# Altium PCB XC7AXXXT.PcbDoc (part 1 of 2)
Units mil, origin at the board's own origin, x right, y up, seen from the top; angles counter-clockwise.
Board outline 2381.89 x 2066.93 mil, 4 copper layers (Top Layer, SIG1, SIG2, Bottom Layer); 188 components, 308 nets, 1233 pads, 145 vias.
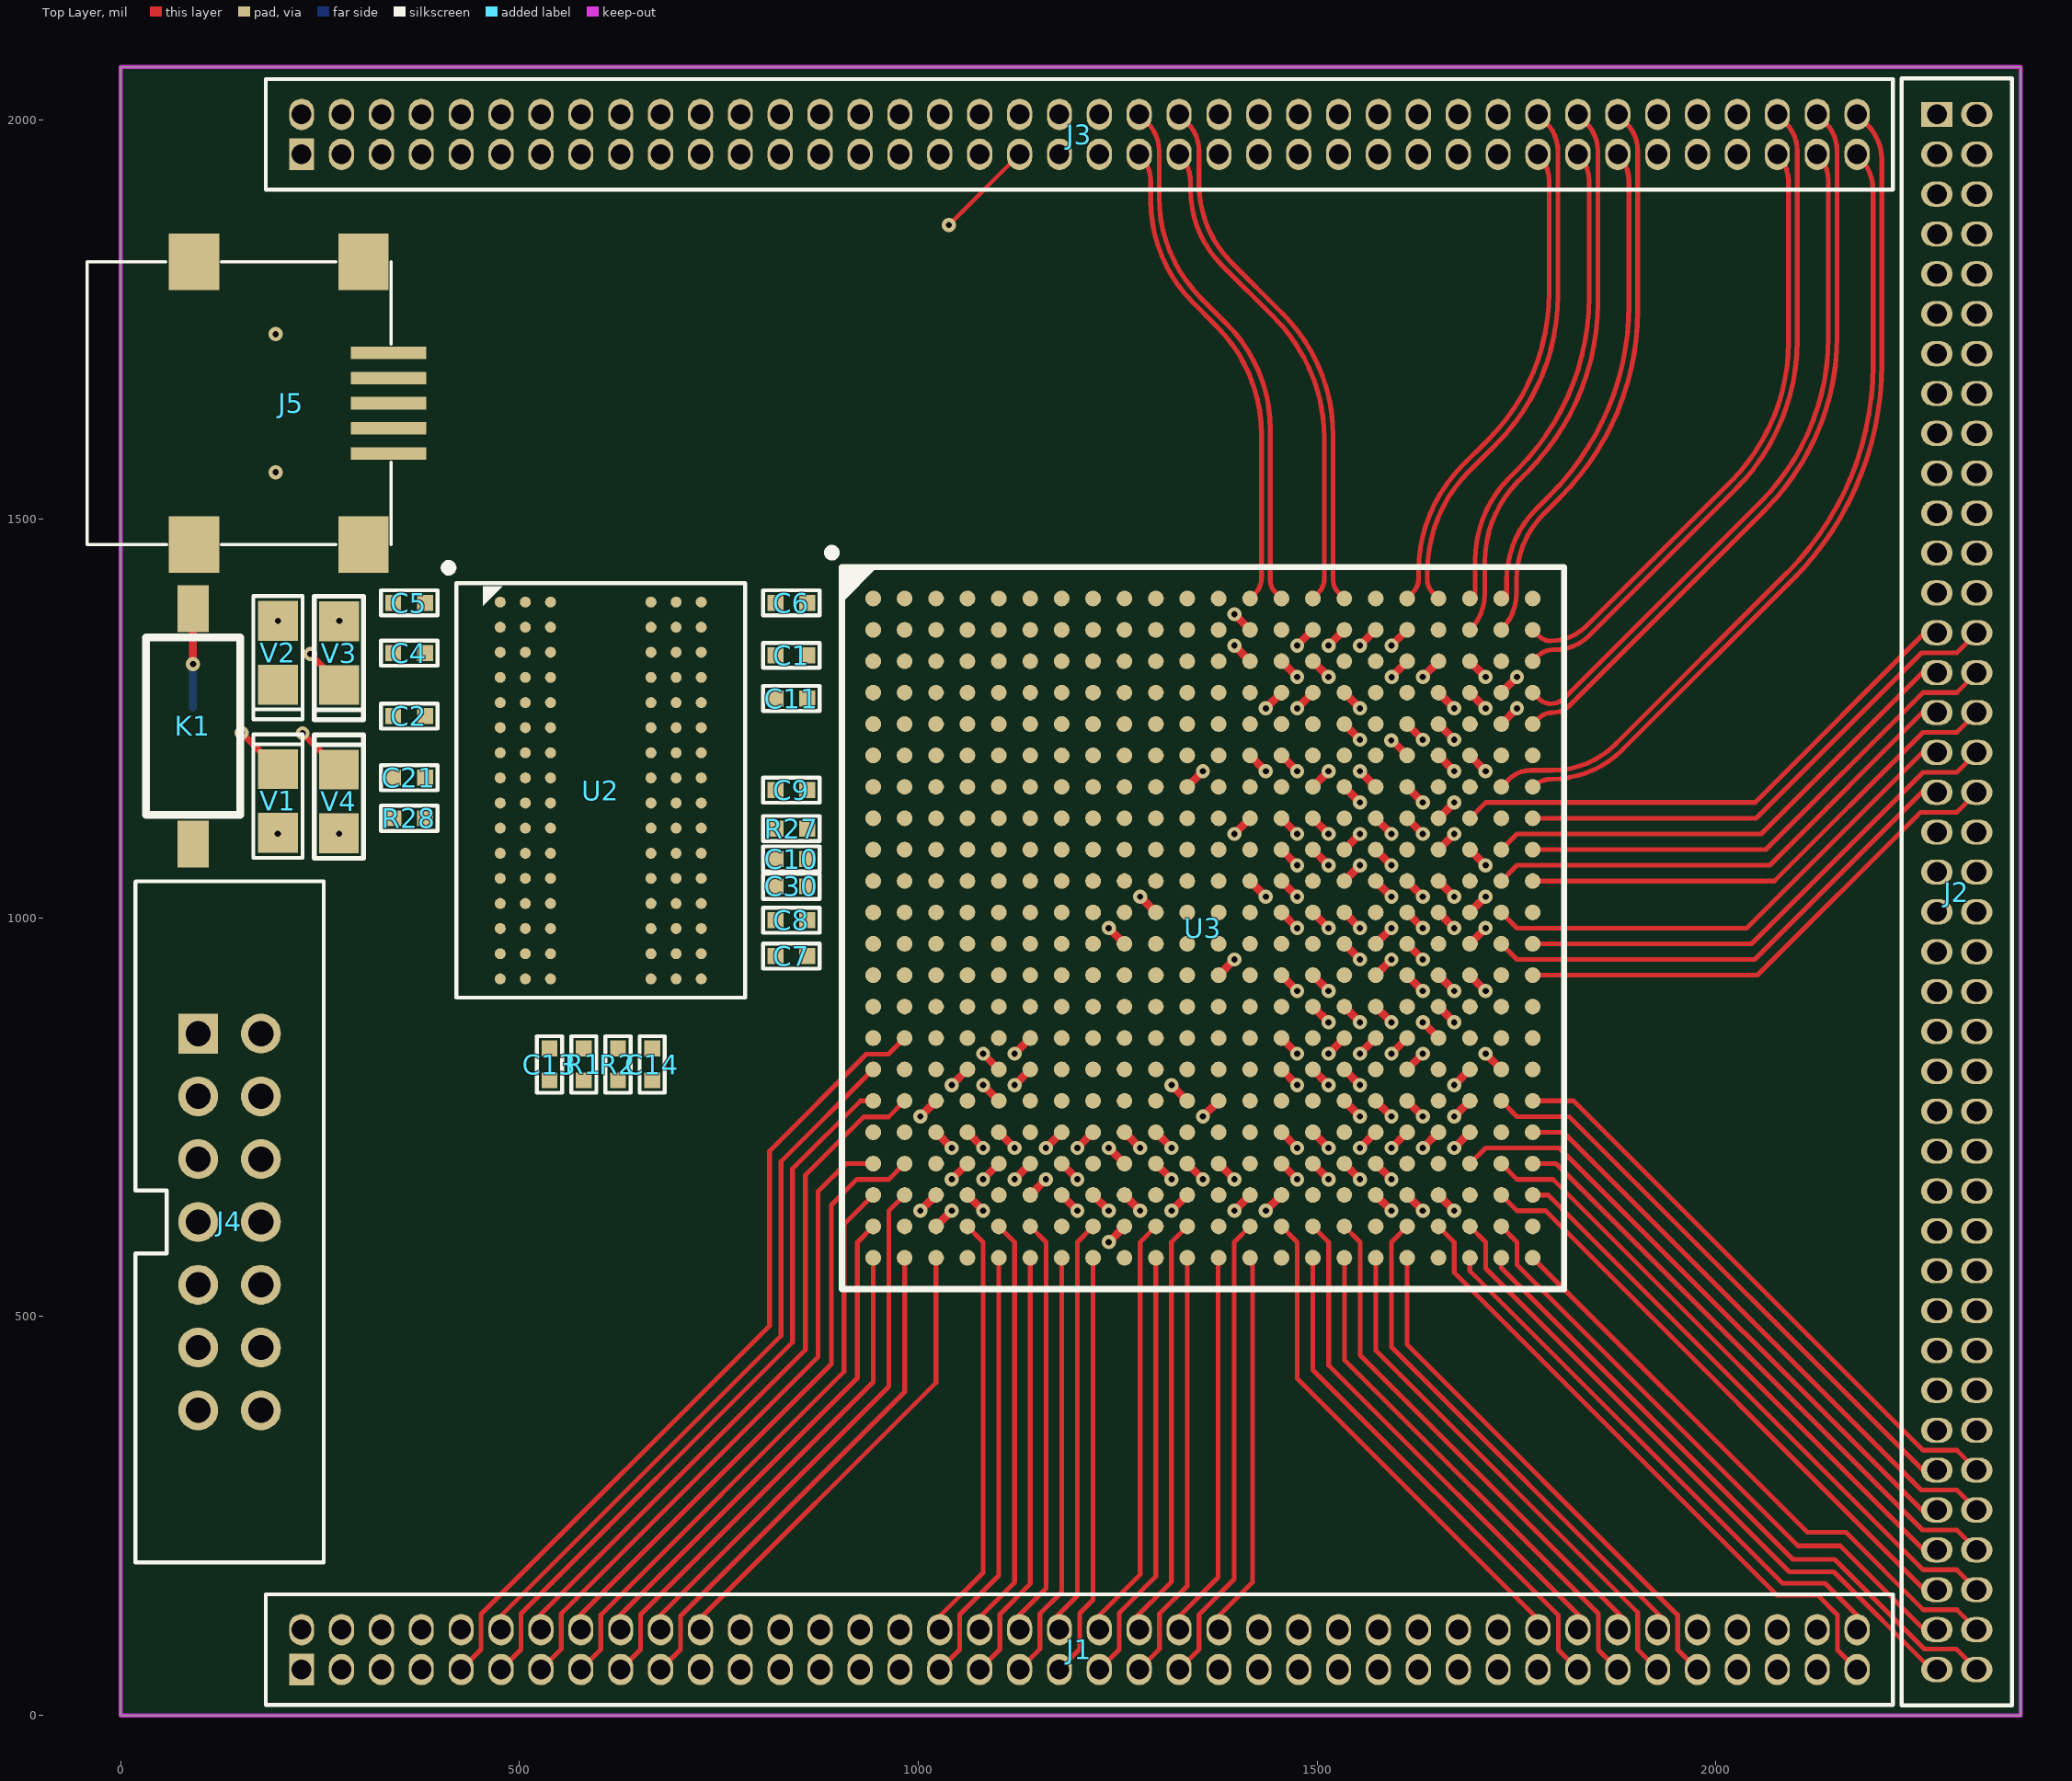
[diagram p0: Top Layer view]
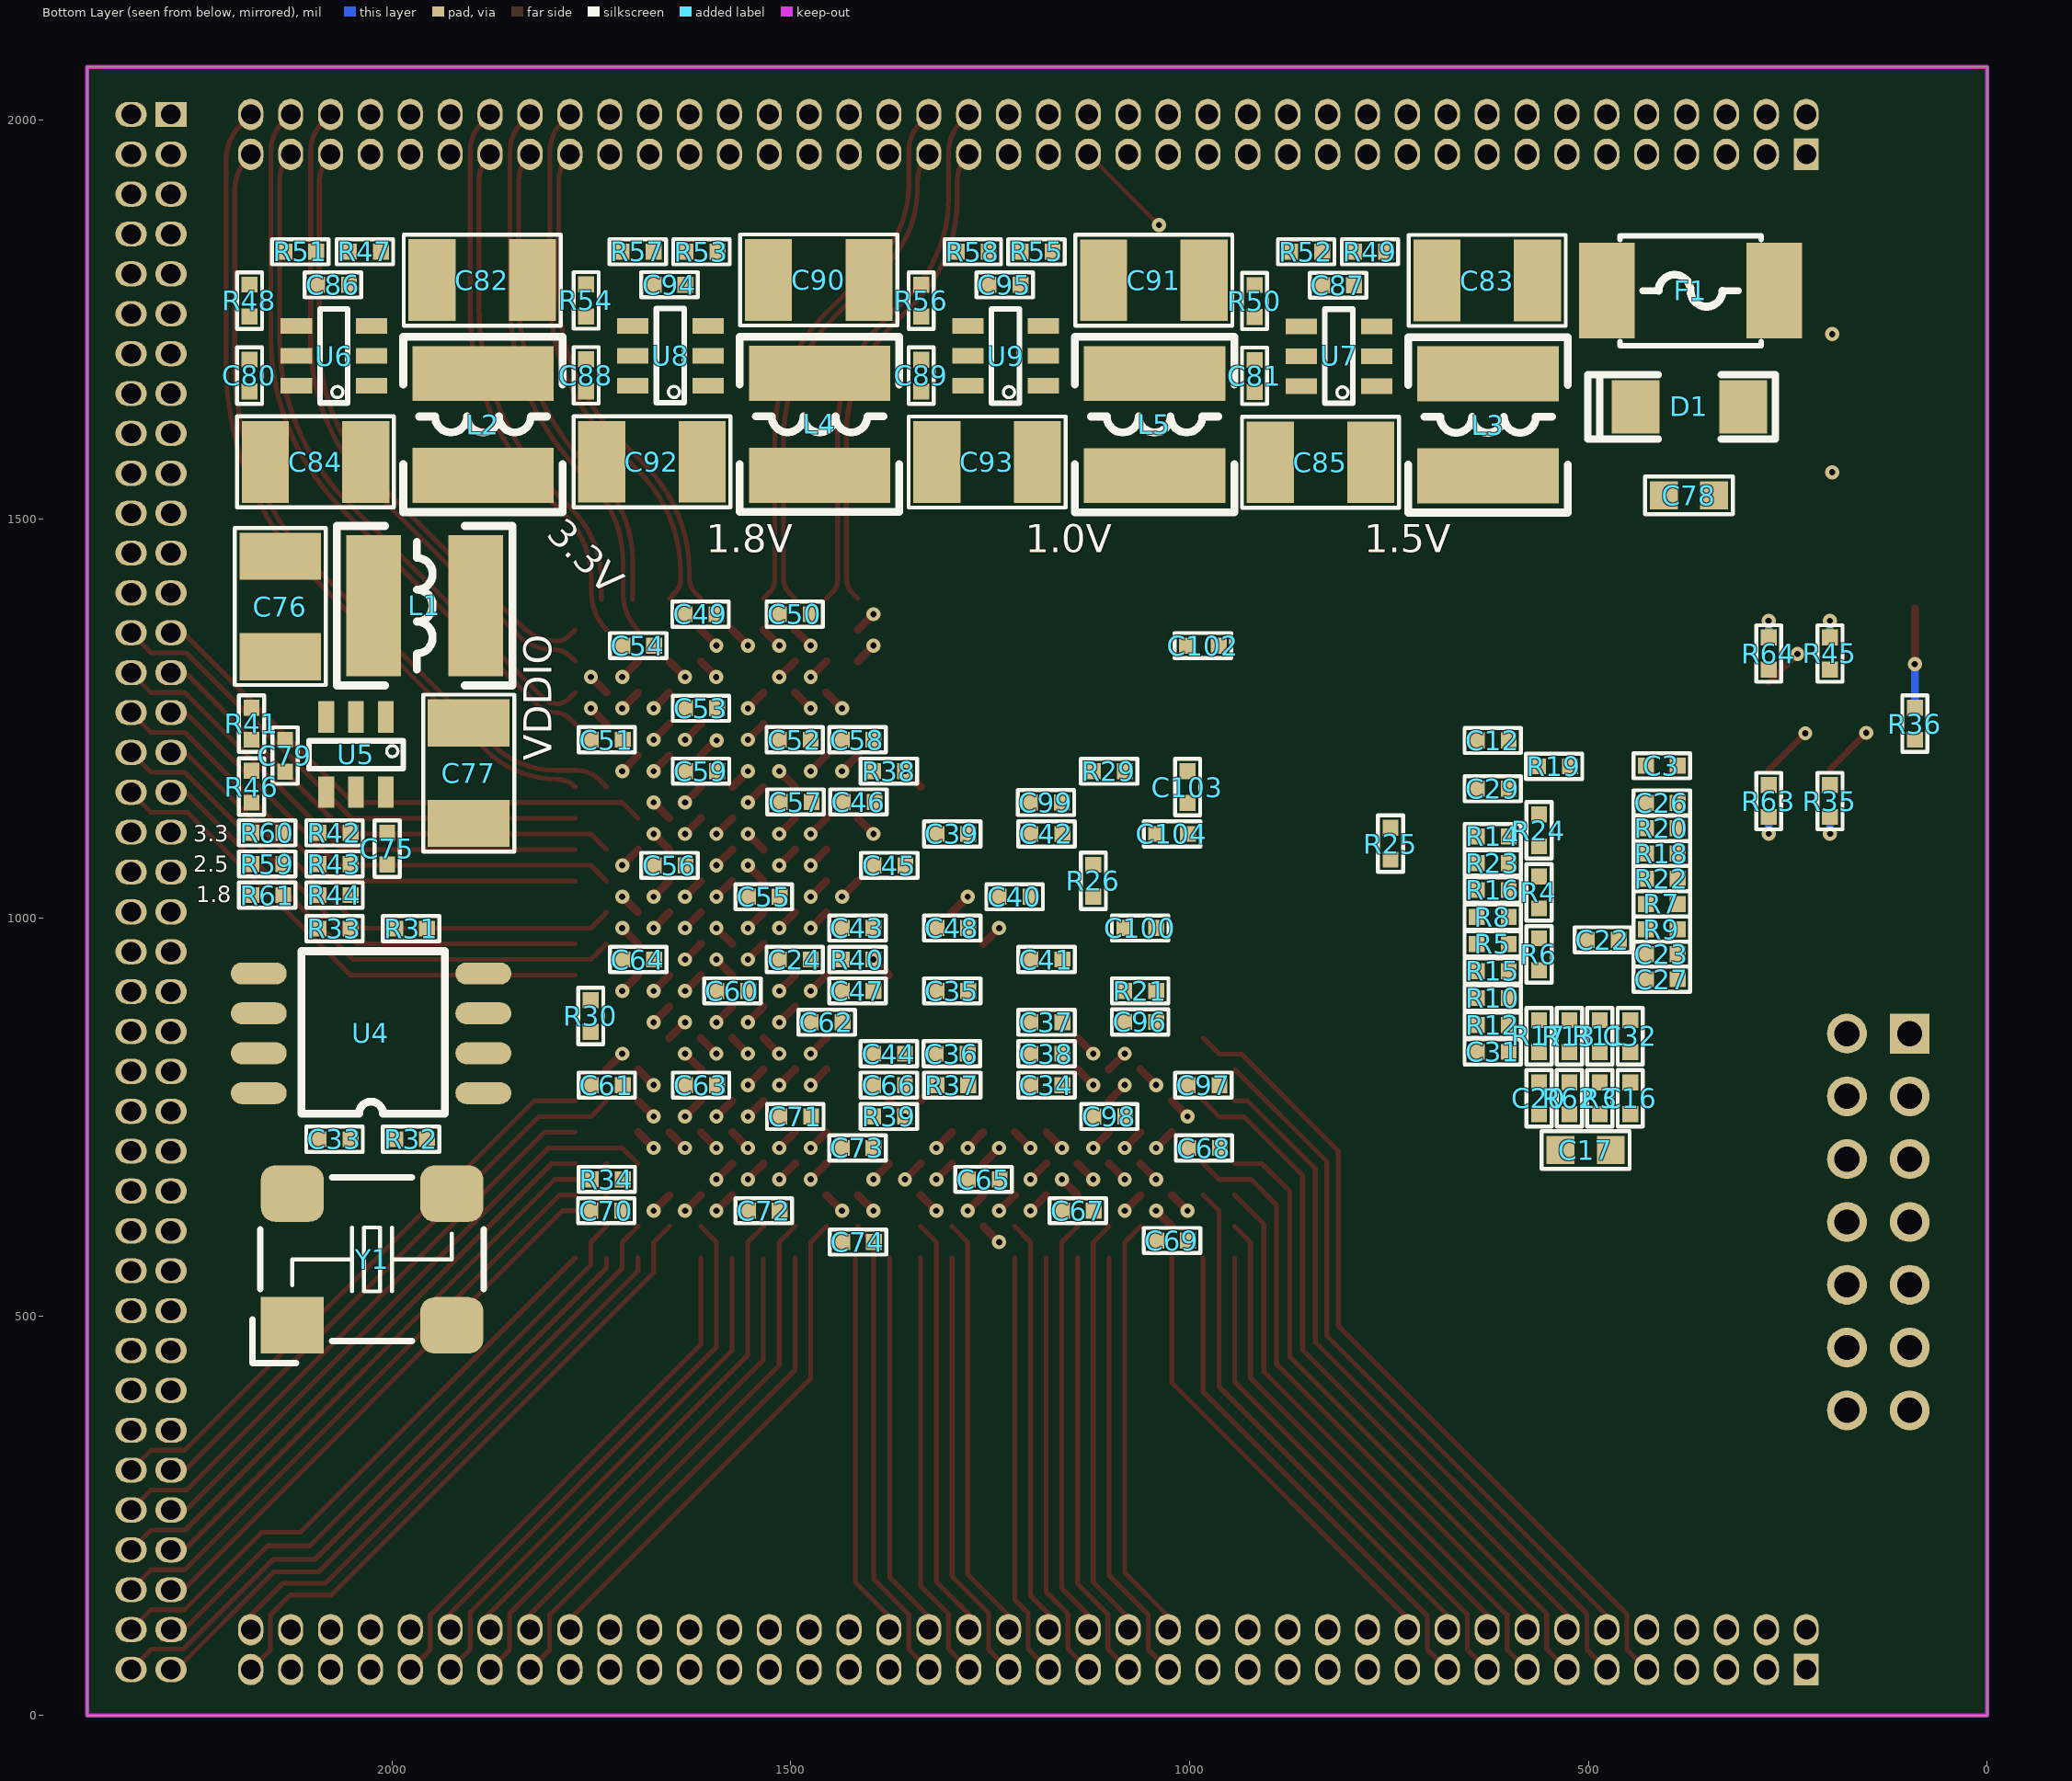
[diagram p1: Bottom Layer view, seen from below]
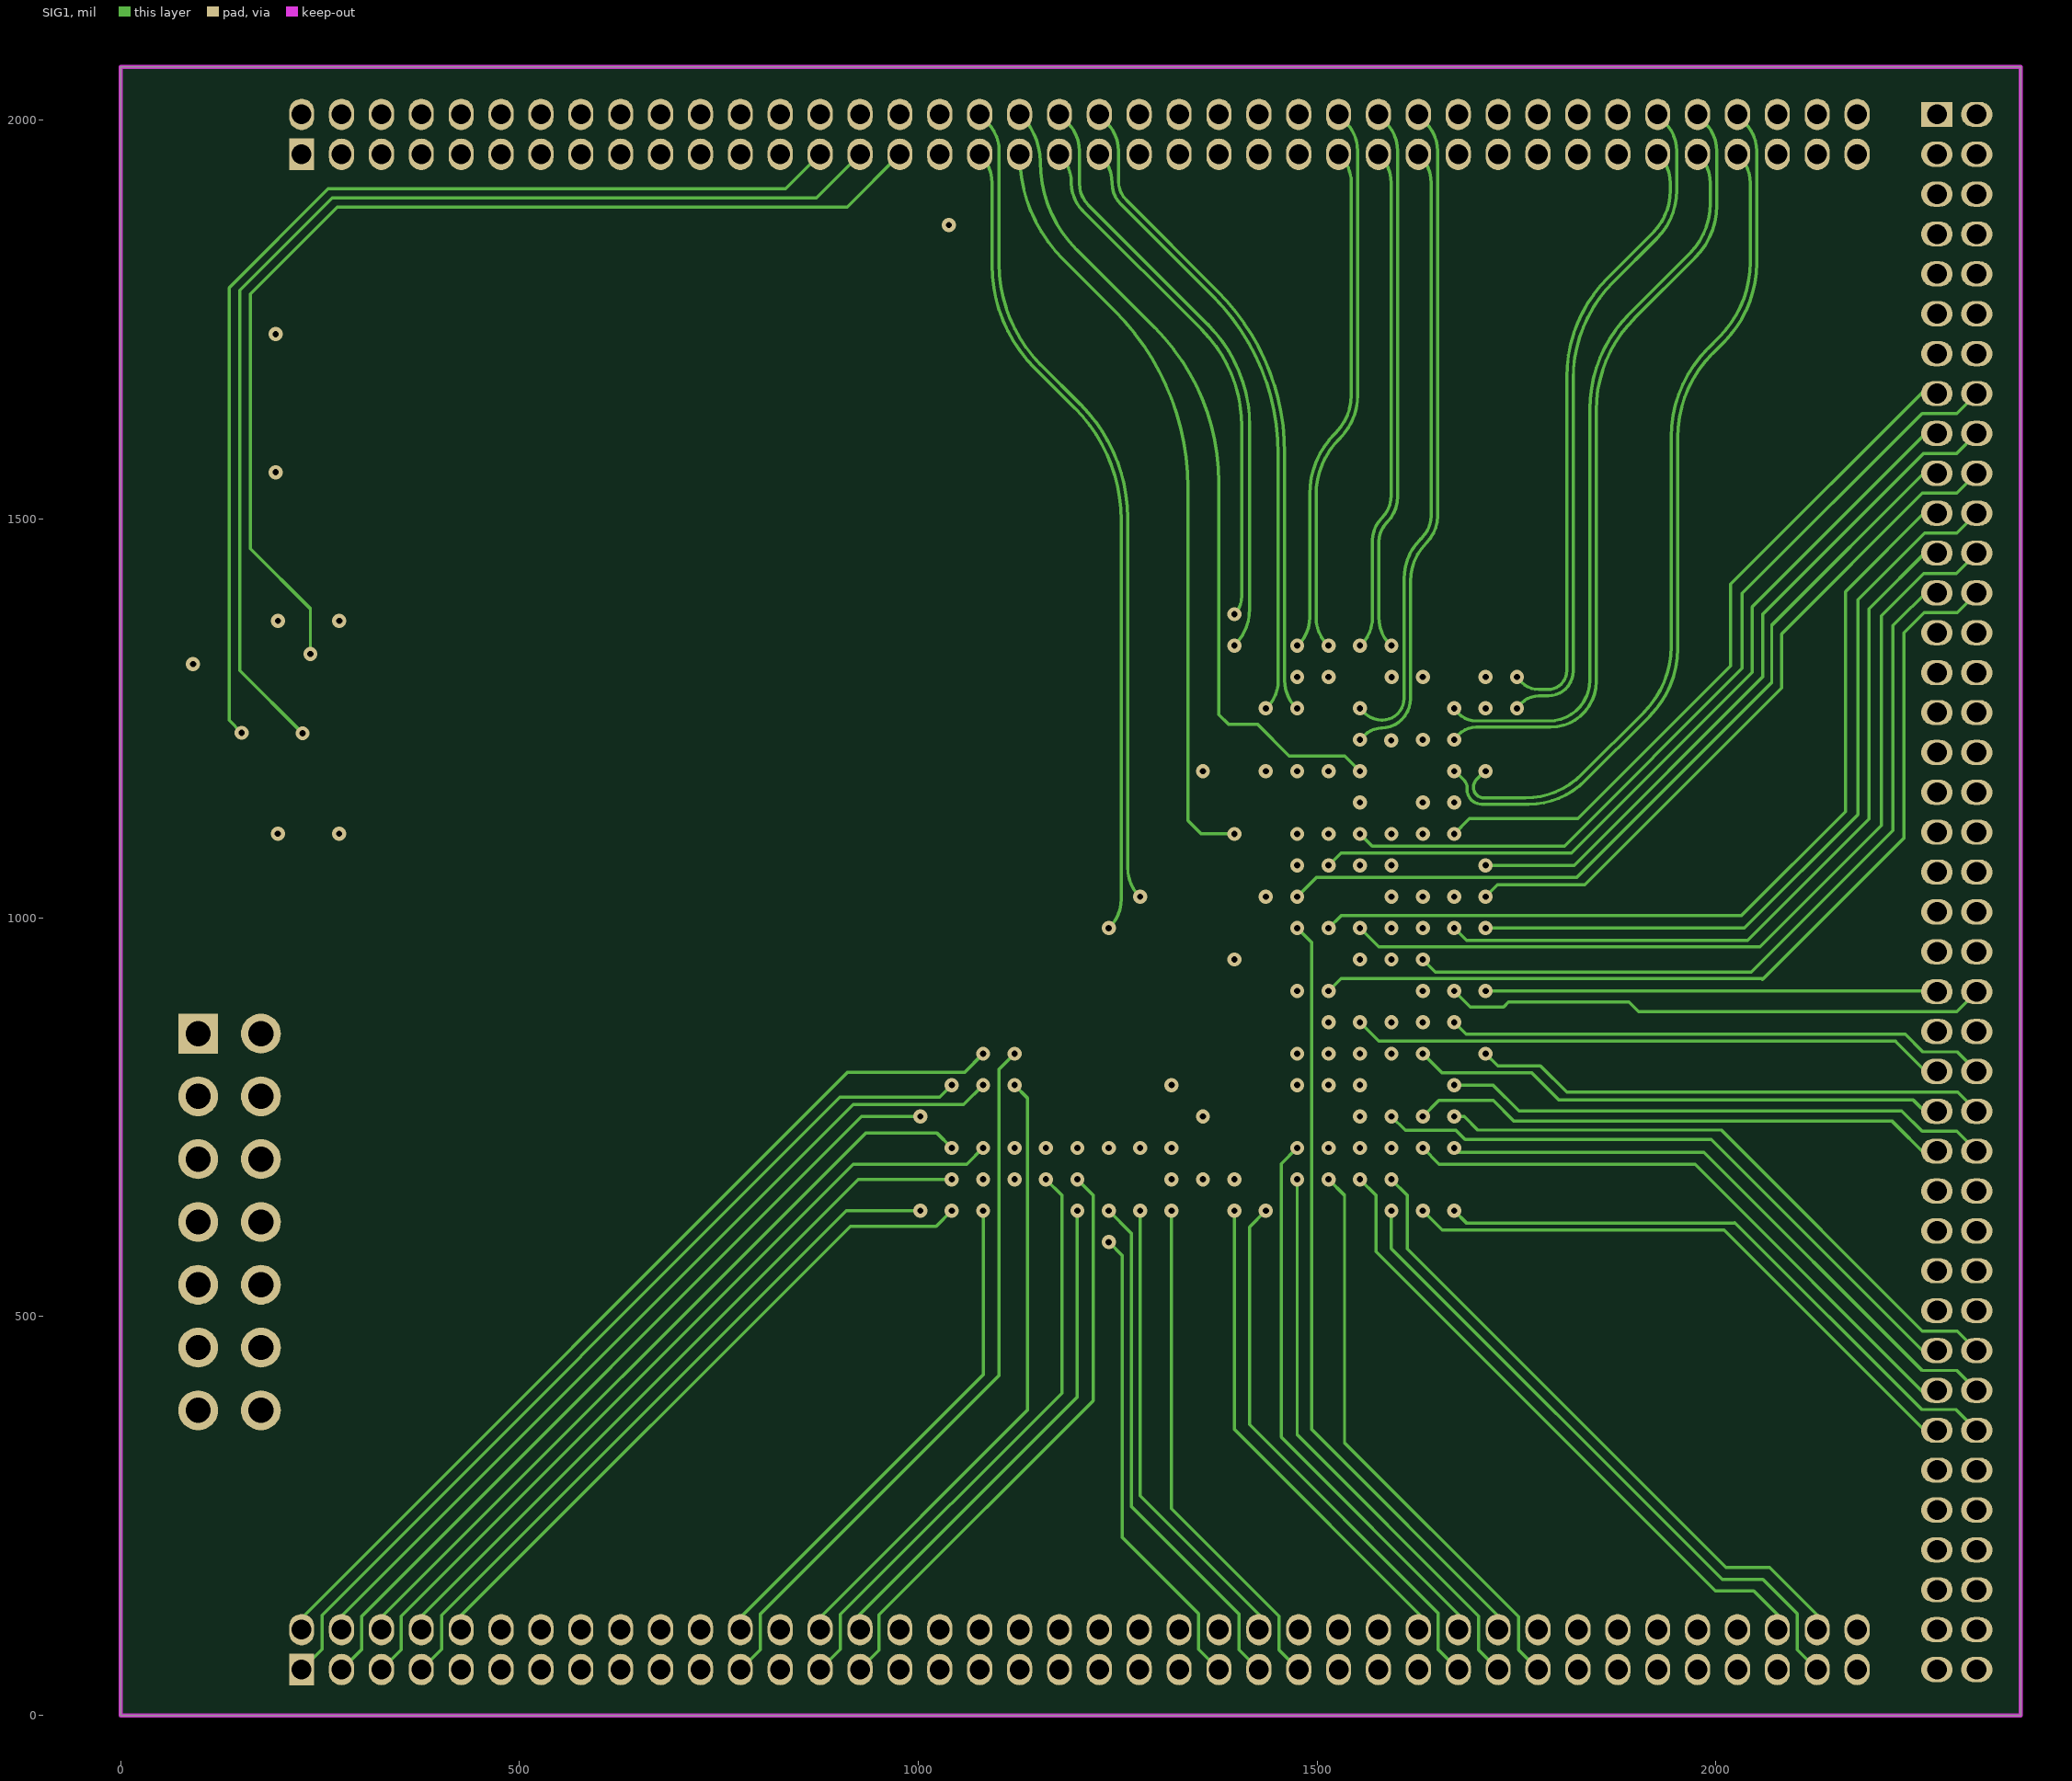
[diagram p2: SIG1]
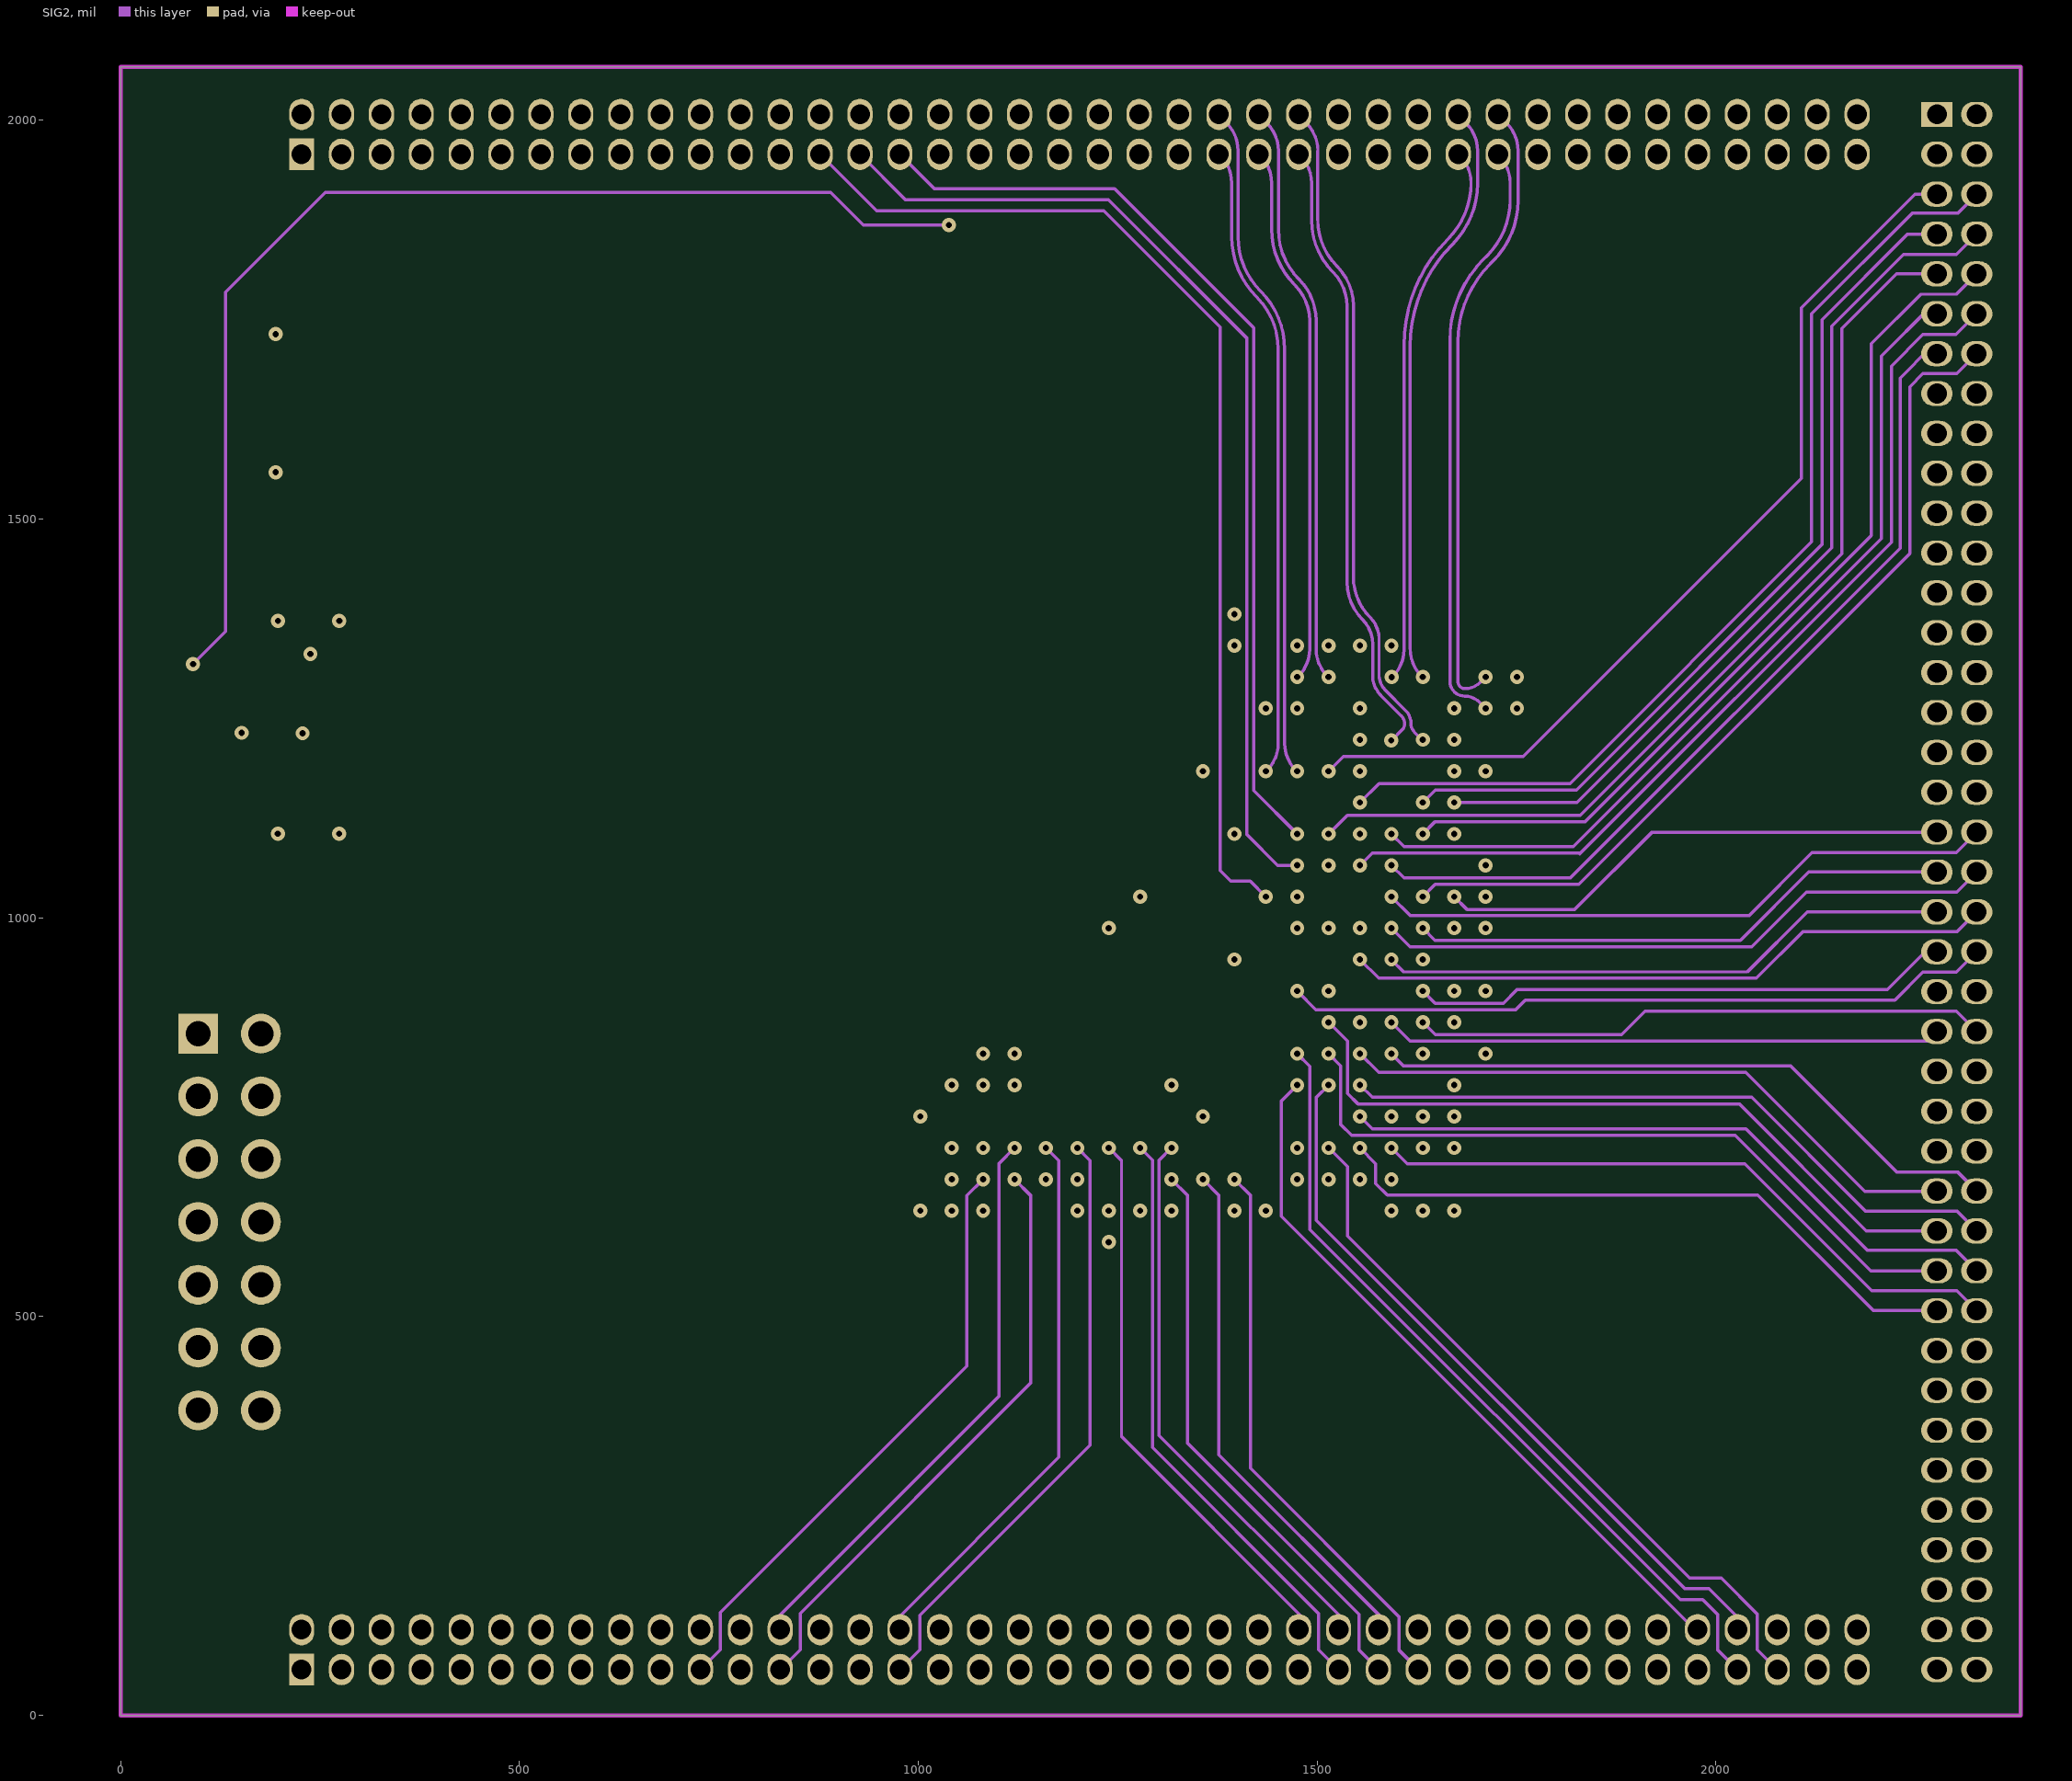
[diagram p3: SIG2]

## Layer stack, top to bottom
Top Layer: signal copper 1.4
Dielectric: core 12.6, FR-4, Dk 4.8
SIG1: signal copper 1.4
Dielectric: prepreg 12.6, FR-4, Dk 4.8
SIG2: signal copper 1.4
Dielectric: core 12.6, FR-4, Dk 4.8
Bottom Layer: signal copper 1.4

## Board outline
0,0 2381.89,0 2381.89,2066.93 0,2066.93

## Design rules (kind name [scope] priority, off if disabled: settings)
Clearance [All] p1: gap=10
DiffPairsRouting [All] p1: maxlimit=10 minlimit=5 mostfreqgap=10 toplayer_prefgap=5 midlayer1_prefgap=5 midlayer2_prefgap=5 bottomlayer_prefgap=5 maxuncoupledlength=500
Height [All] p1: minheight=0 maxheight=10000 prefheight=5000
HoleSize [All] p1: absolutevalues=TRUE maxlimit=1000 minlimit=1 maxpercent=80.000 minpercent=20.000
HoleToHoleClearance [All] p1: gap=0 allowstackedmicrovias=TRUE
MinimumSolderMaskSliver [All] p1: minsoldermaskwidth=0
NetAntennae [All] p1: netantennaetolerance=1000
PlaneClearance [All] p1: clearance=10
PlaneConnect [All] p1: planeconnectstyle=Direct reliefexpansion=20 reliefentries=4 reliefconductorwidth=10 reliefairgap=10
PolygonConnect [All] p1: connectstyle=Direct reliefconductorwidth=30 reliefentries=4 polygonreliefangle="90 Angle"
RoomDefinition POWER [InComponentClass('POWER')] p1: confinementstyle=ConfineIn formatcopy=TRUE lockcomponents=FALSE outline -6220.32,-2995.06 -4220.32,-2995.06 -4220.32,-1995.06 -6220.32,-1995.06
RoomDefinition "FPGA SYSTERM" [InComponentClass('FPGA SYSTERM')] p2: confinementstyle=ConfineIn formatcopy=TRUE lockcomponents=FALSE outline -6220.32,-2995.06 -4220.32,-2995.06 -4220.32,-1995.06 -6220.32,-1995.06
RoomDefinition "FPGA BANK" [InComponentClass('FPGA BANK')] p3: confinementstyle=ConfineIn formatcopy=TRUE lockcomponents=FALSE outline -6220.32,-2995.06 -4220.32,-2995.06 -4220.32,-1995.06 -6220.32,-1995.06
RoomDefinition DDR3 [InComponentClass('DDR3')] p4: confinementstyle=ConfineIn formatcopy=TRUE lockcomponents=FALSE outline -6220.32,-2995.06 -4220.32,-2995.06 -4220.32,-1995.06 -6220.32,-1995.06
RoutingVias [All] p1: holewidth=8 width=16 viastyle="Through Hole" minholewidth=8 minwidth=16 maxholewidth=50 maxwidth=50
SilkToSilkClearance [All] p1: silktosilkclearance=0
SilkscreenOverComponentPads [All] p1: minsilkscreentomaskgap=0
SolderMaskExpansion [All] p1: expansion=2
TestPointUsage [All] p1: valid=0 allowmultiple=FALSE
Testpoint [All] p1: side=15 testpointundercomponent=TRUE minsize=40 maxsize=100 preferedsize=60 minholesize=0 maxholesize=40 preferedholesize=32 testpointgrid=1 style=1021 order=0123456789
Width [All] p1: maxlimit=20 minlimit=4 preferedwidth=8
14 further rules are at their usual default settings.

## Classes and differential pairs
component class POWER: C75 C76 C77 C78 C79 C80 C81 C82 C83 C84 C85 C86 C87 C88 C89 C90 C91 C92 C93 C94 C95 D1 F1 J5 L1 L2 L3 L4 L5 R41 R42 R43 R44 R45 R46 R47 R48 R49 R50 R51 R52 R53 R54 R55 R56 R57 R58 R59 R60 R61 U5 U6 U7 U8 U9 V2
component class "FPGA SYSTERM": C24 C33 C34 C35 C36 C37 C38 C39 C40 C41 C42 C43 C44 C45 C46 C47 C48 C49 C50 C51 C52 C53 C54 C55 C56 C57 C58 C59 C60 C61 C62 C63 C64 C65 C66 C67 C68 C69 C70 C71 C72 C73 C74 C96 C97 C98 C99 C100 C102 C103 C104 J1 J2 J3 J4 K1 R30 R31 R32 R33 R34 R35 R36 R37 R38 R39 R40 R63 R64 U4 V1 V3 V4 Y1
component class "FPGA BANK": U3
component class DDR3: C1 C2 C3 C4 C5 C6 C7 C8 C9 C10 C11 C12 C13 C14 C16 C17 C20 C21 C22 C23 C26 C27 C29 C30 C31 C32 R1 R2 R3 R4 R5 R6 R7 R8 R9 R10 R11 R12 R13 R14 R15 R16 R17 R18 R19 R20 R21 R22 R23 R24 R25 R26 R27 R28 R29 R62 U2
differential pair L24: +L24_P -L24_N
differential pair L23: +L23_P -L23_N
differential pair L22: +L22_P -L22_N
differential pair L21: +L21_P -L21_N
differential pair L20: +L20_P -L20_N
differential pair L19: +L19_P -L19_N
differential pair L18: +L18_P -L18_N
differential pair L17: +L17_P -L17_N
differential pair L16: +L16_P -L16_N
differential pair L15: +L15_P -L15_N
differential pair L14: +L14_P -L14_N
differential pair L13: +L13_P -L13_N
differential pair L11: +L11_P -L11_N
differential pair L10: +L10_P -L10_N
differential pair L9: +L9_P -L9_N
differential pair L8: +L8_P -L8_N
differential pair L7: +L7_P -L7_N
differential pair L6: +L6_P -L6_N
differential pair L5: +L5_P -L5_N
differential pair L3: +L3_P -L3_N
differential pair L1: +L1_P -L1_N
differential pair DDR3_DS1: +DDR3_DS1_P -DDR3_DS1_N
differential pair DDR3_DS0: +DDR3_DS0_P -DDR3_DS0_N
differential pair DDR3_CLK: +DDR3_CLK_P -DDR3_CLK_N

## Components (designator, comment, footprint, x,y, rotation, side; value= is the part's Value field where it differs from the comment)
C1 "0.1uF" 0402_c_m 820.89,1329.2 r0 top locked
C2 "0.1uF" 0402_c_m 381.69,1253 r180 top locked
C3 "0.1uF" 0402_c_m 427.99,1190.7 r180 bottom locked
C4 "0.1uF" 0402_c_m 381.69,1332 r180 top locked
C5 "0.1uF" 0402_c_m 381.69,1395 r180 top locked
C6 "0.1uF" 0402_c_m 820.89,1395 r0 top locked
C7 "0.1uF" 0402_c_m 820.89,952 r0 top locked
C8 "0.1uF" 0402_c_m 820.89,997.1 r0 top locked
C9 "0.1uF" 0402_c_m 820.89,1160.2 r0 top locked
C10 "0.1uF" 0402_c_m 820.89,1074 r0 top locked
C11 "0.1uF" 0402_c_m 820.89,1275.1 r0 top locked
C12 "0.1uF" 0402_c_m 639.89,1222.46 r180 bottom locked
C13 "0.1uF" 0402_c_m 537.69,796.2 r90 top locked
C14 "0.1uF" 0402_c_m 666.39,836.2 r270 top locked
C16 "0.1uF/NC" 0402_c_m 447.59,793.8 r270 bottom locked
C17 "10uF/NC" 0603_c_m 534.38,708.8 r180 bottom locked
C20 "0.1uF/NC" 0402_c_m 561.89,753.8 r90 bottom locked
C21 "0.1uF" 0402_c_m 381.69,1175.78 r180 top locked
C22 "0.1uF" 0402_c_m 461.85,972.5 r0 bottom locked
C23 "0.1uF/NC" 0402_c_m 387.99,954.6 r0 bottom locked
C24 "0.1uF" 0402_c_m 1474.97,947.79 r0 bottom locked
C26 "0.1uF/NC" 0402_c_m 387.99,1144.3 r0 bottom locked
C27 "0.1uF/NC" 0402_c_m 387.99,923 r0 bottom locked
C29 "0.1uF/NC" 0402_c_m 599.89,1162 r0 bottom locked
C30 "0.1uF" 0402_c_m 820.89,1039.55 r0 top locked
C31 "0.1uF/NC" 0402_c_m 599.89,832 r0 bottom locked
C32 "0.1uF/NC" 0402_c_m 447.59,831.69 r90 bottom locked
C33 "0.1uF" 0402_C_M 2091.89,722.5 r180 bottom locked
C34 "0.1uF" 0402_C_M 1199.37,790.32 r180 bottom locked
C35 "0.1uF" 0402_C_M 1317.48,908.42 r180 bottom locked
C36 "0.1uF" 0402_C_M 1278.11,829.69 r0 bottom locked
C37 "0.1uF" 0402_C_M 1199.37,869.05 r180 bottom locked
C38 "0.1uF" 0402_C_M 1199.37,829.69 r180 bottom locked
C39 "0.1uF" 0402_C_M 1317.48,1105.28 r180 bottom locked
C40 "0.1uF" 0402_C_M 1199.37,1026.53 r0 bottom locked
C41 "0.1uF" 0402_C_M 1199.37,947.79 r180 bottom locked
C42 "0.1uF" 0402_C_M 1199.37,1105.27 r180 bottom locked
C43 "0.1uF" 0402_C_M 1396.23,987.17 r0 bottom locked
C44 "0.1uF" 0402_C_M 1356.86,829.68 r0 bottom locked
C45 "0.1uF" 0402_C_M 1396.23,1065.91 r180 bottom locked
C46 "0.1uF" 0402_C_M 1394.89,1145.5 r0 bottom locked
C47 "0.1uF" 0402_C_M 1396.23,908.43 r0 bottom locked
C48 "0.1uF" 0402_C_M 1317.48,987.16 r180 bottom locked
C49 "0.1uF" 0402_C_M 1593.08,1380.86 r0 bottom locked
C50 "0.1uF" 0402_C_M 1474.97,1380.87 r0 bottom locked
C51 "0.1uF" 0402_C_M 1750.56,1223.39 r180 bottom locked
C52 "0.1uF" 0402_C_M 1474.96,1223.38 r0 bottom locked
C53 "0.1uF" 0402_C_M 1632.45,1262.75 r180 bottom locked
C54 "0.1uF" 0402_C_M 1711.18,1341.5 r180 bottom locked
C55 "0.1uF" 0402_C_M 1553.7,1026.54 r180 bottom locked
C56 "0.1uF" 0402_C_M 1671.81,1065.91 r180 bottom locked
C57 "0.1uF" 0402_C_M 1513.89,1145.5 r180 bottom locked
C58 "0.1uF" 0402_C_M 1396.23,1223.39 r0 bottom locked
C59 "0.1uF" 0402_C_M 1632.44,1184.02 r180 bottom locked
C60 "0.1uF" 0402_C_M 1593.07,908.43 r180 bottom locked
C61 "0.1uF" 0402_C_M 1750.56,790.31 r180 bottom locked
C62 "0.1uF" 0402_C_M 1474.96,869.06 r180 bottom locked
C63 "0.1uF" 0402_C_M 1632.44,790.32 r180 bottom locked
C64 "0.1uF" 0402_C_M 1711.18,947.8 r180 bottom locked
C65 "0.1uF" 0402_C_M 1278.11,672.2 r180 bottom locked
C66 "0.1uF" 0402_C_M 1356.85,790.31 r0 bottom locked
C67 "0.1uF" 0402_C_M 1160,632.83 r180 bottom locked
C68 "0.1uF" 0402_C_M 1001.89,711.5 r180 bottom locked
C69 "0.1uF" 0402_C_M 1041.89,595.5 r180 bottom locked
C70 "0.1uF" 0402_C_M 1711.19,632.83 r0 bottom locked
C71 "0.1uF" 0402_C_M 1514.33,750.95 r180 bottom locked
C72 "0.1uF" 0402_C_M 1553.7,632.83 r180 bottom locked
C73 "0.1uF" 0402_C_M 1396.22,711.57 r0 bottom locked
C74 "0.1uF" 0402_C_M 1435.59,593.46 r180 bottom locked
C75 "0.1uF" 0402_C_M 2005.89,1066.81 r90 bottom locked
C76 "22uF" 1210_C_M 2140.89,1327.51 r90 bottom locked
C77 "100uF" 1210_C_M 1902.7,1244.49 r270 bottom
C78 "0.1uF" 0603_C_M 404.89,1529.85 r180 bottom locked
C79 "0.1uF" 0402_C_M 2133.89,1223.5 r270 bottom locked
C80 "0.1uF" 0402_C_M 2178.46,1700.12 r270 bottom locked
C81 "0.1uF" 0402_C_M 918.46,1699.63 r270 bottom locked
C82 "22uF" 1210_C_M 1949.78,1800.74 r180 bottom locked
C83 "22uF" 1210_C_M 689.78,1800.26 r180 bottom locked
C84 "100uF" 1210_C_M 2032.78,1570.74 r0 bottom locked
C85 "100uF" 1210_C_M 772.78,1570.26 r0 bottom locked
C86 "0.1uF" 0402_C_M 2053.79,1793.74 r0 bottom locked
C87 "0.1uF" 0402_C_M 793.79,1793.26 r0 bottom locked
C88 "0.1uF" 0402_C_M 1756.56,1700.28 r270 bottom locked
C89 "0.1uF" 0402_C_M 1336.46,1700.03 r270 bottom locked
C90 "22uF" 1210_C_M 1527.88,1800.9 r180 bottom locked
C91 "22uF" 1210_C_M 1107.78,1800.66 r180 bottom locked
C92 "100uF" 1210_C_M 1610.88,1570.9 r0 bottom locked
C93 "100uF" 1210_C_M 1190.78,1570.66 r0 bottom locked
C94 "0.1uF" 0402_C_M 1631.89,1793.9 r0 bottom locked
C95 "0.1uF" 0402_C_M 1211.79,1793.66 r0 bottom locked
C96 "0.1uF" 0402_C_M 1081.89,869.5 r180 bottom locked
C97 "0.1uF" 0402_C_M 1002.53,790.31 r180 bottom locked
C98 "0.1uF" 0402_C_M 1120.63,750.95 r180 bottom locked
C99 "0.1uF" 0402_C_M 1160.01,1144.65 r0 bottom locked
C100 "0.1uF" 0402_C_M 1041.89,987.17 r0 bottom locked
C102 "0.1uF" 0402_C_M 963.16,1341.5 r0 bottom locked
C103 "0.1uF" 0402_C_M 1002.53,1184.01 r270 bottom locked
C104 "0.1uF" 0402_C_M 1041.9,1105.28 r180 bottom locked
D1 "7.5V" 1206D 306.09,1640.59 r0 bottom locked
F1 "1A" 1812F 267.19,1786.74 r270 bottom locked
J1 "DIP80-1.27" DIP1.27-80 226.89,57.5 r90 top locked
J2 "DIP80-1.27" DIP1.27-80 2276.89,2007.5 r0 top locked
J3 "DIP80-1.27" DIP1.27-80 226.89,1957.5 r90 top locked
J4 "DC3-14-2.0" DC3-14-2.0 97.15,854.94 r0 top locked
J5 "miniUSB" miniUSB 336.1,1708.36 r0 top locked
K1 "KEY" KEY2 90.79,1387.78 r270 top locked
L1 "3.3uH" CD42 1958.87,1391.5 r180 bottom locked
L2 "3.3uH" CD42 1885.79,1618.72 r270 bottom locked
L3 "3.3uH" CD42 625.79,1618.23 r270 bottom locked
L4 "3.3uH" CD42 1463.89,1618.88 r270 bottom locked
L5 "3.3uH" CD42 1043.79,1618.63 r270 bottom locked
R1 "3.3k" 0402_r_m 580.59,836.2 r270 top locked
R2 "3.3k" 0402_r_m 623.49,796.2 r90 top locked
R3 "3.3k/NC" 0402_r_m 485.69,753.8 r90 bottom locked
R4 "49.9/NC" 0402_r_m 561.89,1051.86 r270 bottom locked
R5 "49.9/NC" 0402_r_m 639.89,967.21 r180 bottom locked
R6 "49.9/NC" 0402_r_m 561.89,974.32 r270 bottom locked
R7 "49.9/NC" 0402_r_m 427.99,1017.45 r180 bottom locked
R8 "49.9/NC" 0402_r_m 639.89,1001.09 r180 bottom locked
R9 "49.9/NC" 0402_r_m 427.99,985.8 r180 bottom locked
R10 "49.9/NC" 0402_r_m 639.89,899.47 r180 bottom locked
R11 "49.9/NC" 0402_r_m 485.8,871.69 r270 bottom locked
R12 "49.9/NC" 0402_r_m 639.89,865.6 r180 bottom locked
R13 "49.9/NC" 0402_r_m 523.84,871.69 r270 bottom locked
R14 "49.9/NC" 0402_r_m 639.89,1102 r180 bottom locked
R15 "49.9/NC" 0402_r_m 639.89,933.34 r180 bottom locked
R16 "49.9/NC" 0402_r_m 639.89,1034.96 r180 bottom locked
R17 "49.9/NC" 0402_r_m 561.89,871.69 r270 bottom locked
R18 "49.9/NC" 0402_r_m 427.99,1080.75 r180 bottom locked
R19 "49.9/NC" 0402_r_m 523,1190 r0 bottom locked
R20 "49.9/NC" 0402_r_m 427.99,1112.4 r180 bottom locked
R21 "100" 0402_r_m 1041.89,908.43 r0 bottom locked
R22 "49.9/NC" 0402_r_m 427.99,1049.1 r180 bottom locked
R23 "49.9/NC" 0402_r_m 639.89,1068.83 r180 bottom locked
R24 "49.9/NC" 0402_r_m 561.89,1089.7 r90 bottom locked
R25 "240 1%" 0402_R_M 748,1073 r90 bottom locked
R26 "100" 0402_r_m 1120.63,1026.54 r90 bottom locked
R27 "10k" 0402_r_m 820.89,1112 r0 top locked
R28 "10k" 0402_r_m 381.8,1124.9 r180 top locked
R29 "10k" 0402_r_m 1081,1183.75 r0 bottom locked
R30 "10k" 0402_R_M 1750.69,857 r90 bottom locked
R31 "10k" 0402_R_M 1955.89,986.5 r0 bottom locked
R32 "10k" 0402_R_M 1995.89,722.5 r180 bottom locked
R33 "22" 0402_R_M 2091.89,986.5 r180 bottom locked
R34 "22" 0402_R_M 1750.56,672.2 r180 bottom locked
R35 "3.3k" 0402_R_M 197.19,1126.5 r90 bottom locked
R36 "10k" 0402_R_M 90.69,1263.5 r270 bottom locked
R37 "10k" 0402_R_M 1317.48,790.32 r180 bottom locked
R38 "10k" 0402_R_M 1356.86,1184.02 r0 bottom locked
R39 "10k" 0402_R_M 1356.85,750.94 r0 bottom locked
R40 "10k" 0402_R_M 1396.23,947.8 r0 bottom locked
R41 "10k" 0402_R_M 2175.89,1223.5 r90 bottom locked
R42 "31.6k" 0402_R_M 2091.89,1106.5 r180 bottom locked
R43 "22k" 0402_R_M 2091.89,1067.5 r180 bottom locked
R44 "12.4k" 0402_R_M 2091.89,1028.5 r180 bottom locked
R45 "3.3k" 0402_R_M 197.19,1351.5 r270 bottom locked
R46 "10k" 0402_R_M 2175.89,1144.5 r90 bottom locked
R47 "10k" 0402_R_M 2053.79,1835.26 r180 bottom locked
R48 "31.6k" 0402_R_M 2178.46,1794.06 r270 bottom locked
R49 "10k" 0402_R_M 793.79,1835.26 r180 bottom locked
R50 "9.1k" 0402_R_M 918.46,1793.57 r270 bottom locked
R51 "10k" 0402_R_M 2134.79,1835.26 r180 bottom locked
R52 "10k" 0402_R_M 873.79,1835.26 r180 bottom locked
R53 "10k" 0402_R_M 1631.89,1835.26 r180 bottom locked
R54 "12.4k" 0402_R_M 1756.56,1794.21 r270 bottom locked
R55 "3.3k" 0402_R_M 1211.79,1835.26 r180 bottom locked
R56 "3.3k" 0402_R_M 1336.46,1793.97 r270 bottom locked
R57 "10k" 0402_R_M 1711.89,1835.26 r180 bottom locked
R58 "10k" 0402_R_M 1291.79,1835.26 r180 bottom locked
R59 "0" 0402_R_M 2176.2,1067.5 r180 bottom locked
R60 "NC" 0402_R_M 2176.2,1106.5 r180 bottom locked
R61 "NC" 0402_R_M 2176.2,1028.5 r180 bottom locked
R62 "3.3k/NC" 0402_r_m 523.79,793.8 r270 bottom locked
R63 "3.3k" 0402_R_M 273.9,1126.5 r90 bottom locked
R64 "3.3k" 0402_R_M 273.9,1351.5 r270 bottom locked
U2 "NT5CB128M16IP-DI" TFBGA96 475.9,1396 r0 top locked
U3 "XC7AxxxT-FBG484" FBG484 943.47,1399.29 r0 top locked
U4 "N25Q128A13ESE40F" SOP8W 1885.3,780.3 r0 bottom locked
U5 "JW5033STSOTB#PBF" SOT23-6 2007.49,1251.99 r270 bottom locked
U6 "JW5033STSOTB#PBF" SOT23-6 2025.3,1667.34 r0 bottom locked
U7 "JW5033STSOTB#PBF" SOT23-6 765.3,1666.85 r0 bottom locked
U8 "JW5033STSOTB#PBF" SOT23-6 1603.4,1667.5 r0 bottom locked
U9 "JW5033STSOTB#PBF" SOT23-6 1183.3,1667.25 r0 bottom locked
V1 "LED" 0805D 197.19,1106.5 r90 top locked
V2 "LED" 0805D 197.29,1372.5 r270 top locked
V3 "LED" 0805D 273.7,1372 r270 top locked
V4 "LED" 0805D 273.6,1106 r90 top locked
Y1 "50MHz" "OSC 7050-4P" 2024.89,571.7 r180 bottom locked

## Footprints (in the part's own frame and the unit in brackets; to place one, negate y for a bottom-side part, rotate by r counter-clockwise, add the part's x,y. Pads: shape width x height; smd on the part's side, far side on the other; paste and mask are expansions set on the pad)
0402_c_m [mil]
  rect 20x20 smd mask+2: 1(0,0) 2(40,0)
  silkscreen extent -15,-16 55,16, body extent -2,-12 43,12, height 20
0402_C_M [mil]
  rect 20x20 smd mask+2: 1(0,0) 2(40,0)
  silkscreen extent -15,-16 55,16, body extent -2,-12 43,12, height 20
0402_r_m [mil]
  rect 20x20 smd mask+2: 1(0,0) 2(40,0)
  silkscreen extent -15,-16 55,16, body extent -2,-12 43,12, height 14
0402_R_M [mil]
  rect 20x20 smd mask+2: 1(0,0) 2(40,0)
  silkscreen extent -15,-16 55,16, body extent -2,-12 43,12, height 14
0603_c_m [mil]
  rect 35x35 smd mask+2: 1(-0.5,0) 2(62.5,0)
  silkscreen extent -24,-24 86,24, body extent -2,-20 64,20, height 32
0603_C_M [mil]
  rect 35x35 smd mask+2: 1(-0.5,0) 2(62.5,0)
  silkscreen extent -24,-24 86,24, body extent -2,-20 64,20, height 32
0805D [mil]
  rect 50x50 smd mask+2: 1(0,0) 2(80,0)
  silkscreen extent -31,-31 124,31, body extent -7,-25 87,25, height 39
1206D [mil]
  rect 60x66.93 smd: 1(-0.2,-0.2) 2(134.8,-0.2)
  silkscreen extent -41,-41 195,40, body extent -13,-41 147,39, height 79
1210_C_M [mm]
  rect 1.5x2.6 smd mask+0.051: 1(0,-0.025) 2(3.2,-0.025)
  silkscreen extent -0.9,-1.48 4.1,1.42, body extent -0.05,-1.34 3.25,1.28, height 2.51
1812F [mil]
  rect 120x70 smd: 1(0.3,0.3) 2(0.3,-209.7)
  silkscreen extent -69,-193 69,-16, body extent -69,-223 68,10, height 43
CD42 [mm] "4.5*4*2mm（长宽高）"
  rect 1.75x4.5 smd: 1(-1.625,0) 2(1.625,0)
  silkscreen extent -2.79,-2.54 2.79,2.54, body extent -2.21,-2 2.21,2, height 2.1
DC3-14-2.0 [mm]
  rect 1.27x1.27 hole 0.8: 1(0,0)
  round 1.27 hole 0.8: 2(0,-2) 3(0,-4) 4(0,-6) 5(0,-8) 6(0,-10) 7(0,-12) 8(2,0) 9(2,-2) 10(2,-4) 11(2,-6) 12(2,-8) 13(2,-10) 14(2,-12)
  silkscreen extent -2,-16.84 4,4.85, body extent -2.13,-16.92 4.17,4.93, height 8
DIP1.27-80 [mm]
  rect 1x0.8 hole 0.63: 1(0,0)
  oval 1x0.8 hole 0.63: 2(1.27,0) 3(0,-1.27) 4(1.27,-1.27) 5(0,-2.54) 6(1.27,-2.54) 7(0,-3.81) 8(1.27,-3.81) 9(0,-5.08) 10(1.27,-5.08) 11(0,-6.35) 12(1.27,-6.35) 13(0,-7.62) 14(1.27,-7.62) 15(0,-8.89) 16(1.27,-8.89) 17(0,-10.16) 18(1.27,-10.16) 19(0,-11.43) 20(1.27,-11.43) 21(0,-12.7) 22(1.27,-12.7) 23(0,-13.97) 24(1.27,-13.97) 25(0,-15.24) 26(1.27,-15.24) 27(0,-16.51) 28(1.27,-16.51) 29(0,-17.78) 30(1.27,-17.78) 31(0,-19.05) 32(1.27,-19.05) 33(0,-20.32) 34(1.27,-20.32) 35(0,-21.59) 36(1.27,-21.59) 37(0,-22.86) 38(1.27,-22.86) 39(0,-24.13) 40(1.27,-24.13) 41(0,-25.4) 42(1.27,-25.4) 43(0,-26.67) 44(1.27,-26.67) 45(0,-27.94) 46(1.27,-27.94) 47(0,-29.21) 48(1.27,-29.21) 49(0,-30.48) 50(1.27,-30.48) 51(0,-31.75) 52(1.27,-31.75) 53(0,-33.02) 54(1.27,-33.02) 55(0,-34.29) 56(1.27,-34.29) 57(0,-35.56) 58(1.27,-35.56) 59(0,-36.83) 60(1.27,-36.83) 61(0,-38.1) 62(1.27,-38.1) 63(0,-39.37) 64(1.27,-39.37) 65(0,-40.64) 66(1.27,-40.64) 67(0,-41.91) 68(1.27,-41.91) 69(0,-43.18) 70(1.27,-43.18) 71(0,-44.45) 72(1.27,-44.45) 73(0,-45.72) 74(1.27,-45.72) 75(0,-46.99) 76(1.27,-46.99) 77(0,-48.26) 78(1.27,-48.26) 79(0,-49.53) 80(1.27,-49.53)
  silkscreen extent -1.12,-50.67 2.39,1.14
FBG484 [mm]
  round 0.5 smd: A1(0,0.032) A2(1,0.032) A3(2,0.032) A4(3,0.032) A5(4,0.032) A6(5,0.032) A7(6,0.032) A8(7,0.032) A9(8,0.032) A10(9,0.032) A11(10,0.032) A12(11,0.032) A13(12,0.032) A14(13,0.032) A15(14,0.032) A16(15,0.032) A17(16,0.032) A18(17,0.032) A19(18,0.032) A20(19,0.032) A21(20,0.032) A22(21,0.032) AA1(0,-19.968) AA2(1,-19.968) AA3(2,-19.968) AA4(3,-19.968) AA5(4,-19.968) AA6(5,-19.968) AA7(6,-19.968) AA8(7,-19.968) AA9(8,-19.968) AA10(9,-19.968) AA11(10,-19.968) AA12(11,-19.968) AA13(12,-19.968) AA14(13,-19.968) AA15(14,-19.968) AA16(15,-19.968) AA17(16,-19.968) AA18(17,-19.968) AA19(18,-19.968) AA20(19,-19.968) AA21(20,-19.968) AA22(21,-19.968) AB1(0,-20.968) AB2(1,-20.968) AB3(2,-20.968) AB4(3,-20.968) AB5(4,-20.968) AB6(5,-20.968) AB7(6,-20.968) AB8(7,-20.968) AB9(8,-20.968) AB10(9,-20.968) AB11(10,-20.968) AB12(11,-20.968) AB13(12,-20.968) AB14(13,-20.968) AB15(14,-20.968) AB16(15,-20.968) AB17(16,-20.968) AB18(17,-20.968) AB19(18,-20.968) AB20(19,-20.968) AB21(20,-20.968) AB22(21,-20.968) B1(0,-0.968) B2(1,-0.968) B3(2,-0.968) B4(3,-0.968) B5(4,-0.968) B6(5,-0.968) B7(6,-0.968) B8(7,-0.968) B9(8,-0.968) B10(9,-0.968) B11(10,-0.968) B12(11,-0.968) B13(12,-0.968) B14(13,-0.968) B15(14,-0.968) B16(15,-0.968) B17(16,-0.968) B18(17,-0.968) B19(18,-0.968) B20(19,-0.968) B21(20,-0.968) B22(21,-0.968) C1(0,-1.968) C2(1,-1.968) C3(2,-1.968) C4(3,-1.968) C5(4,-1.968) C6(5,-1.968) C7(6,-1.968) C8(7,-1.968) C9(8,-1.968) C10(9,-1.968) C11(10,-1.968) C12(11,-1.968) C13(12,-1.968) C14(13,-1.968) C15(14,-1.968) C16(15,-1.968) C17(16,-1.968) C18(17,-1.968) C19(18,-1.968) C20(19,-1.968) C21(20,-1.968) C22(21,-1.968) D1(0,-2.968) D2(1,-2.968) D3(2,-2.968) D4(3,-2.968) D5(4,-2.968) D6(5,-2.968) D7(6,-2.968) D8(7,-2.968) D9(8,-2.968) D10(9,-2.968) D11(10,-2.968) D12(11,-2.968) D13(12,-2.968) D14(13,-2.968) D15(14,-2.968) D16(15,-2.968) D17(16,-2.968) D18(17,-2.968) D19(18,-2.968) D20(19,-2.968) D21(20,-2.968) D22(21,-2.968) E1(0,-3.968) E2(1,-3.968) E3(2,-3.968) E4(3,-3.968) E5(4,-3.968) E6(5,-3.968) E7(6,-3.968) E8(7,-3.968) E9(8,-3.968) E10(9,-3.968) E11(10,-3.968) E12(11,-3.968) E13(12,-3.968) E14(13,-3.968) E15(14,-3.968) E16(15,-3.968) E17(16,-3.968) E18(17,-3.968) E19(18,-3.968) E20(19,-3.968) E21(20,-3.968) E22(21,-3.968) F1(0,-4.968) F2(1,-4.968) F3(2,-4.968) F4(3,-4.968) F5(4,-4.968) F6(5,-4.968) F7(6,-4.968) F8(7,-4.968) F9(8,-4.968) F10(9,-4.968) F11(10,-4.968) F12(11,-4.968) F13(12,-4.968) F14(13,-4.968) F15(14,-4.968) F16(15,-4.968) F17(16,-4.968) F18(17,-4.968) F19(18,-4.968) F20(19,-4.968) F21(20,-4.968) F22(21,-4.968) G1(0,-5.968) G2(1,-5.968) G3(2,-5.968) G4(3,-5.968) G5(4,-5.968) G6(5,-5.968) G7(6,-5.968) G8(7,-5.968) G9(8,-5.968) G10(9,-5.968) G11(10,-5.968) G12(11,-5.968) G13(12,-5.968) G14(13,-5.968) G15(14,-5.968) G16(15,-5.968) G17(16,-5.968) G18(17,-5.968) G19(18,-5.968) G20(19,-5.968) G21(20,-5.968) G22(21,-5.968) H1(0,-6.968) H2(1,-6.968) H3(2,-6.968) H4(3,-6.968) H5(4,-6.968) H6(5,-6.968) H7(6,-6.968) H8(7,-6.968) H9(8,-6.968) H10(9,-6.968) H11(10,-6.968) H12(11,-6.968) H13(12,-6.968) H14(13,-6.968) H15(14,-6.968) H16(15,-6.968) H17(16,-6.968) H18(17,-6.968) H19(18,-6.968) H20(19,-6.968) H21(20,-6.968) H22(21,-6.968) J1(0,-7.968) J2(1,-7.968) J3(2,-7.968) J4(3,-7.968) J5(4,-7.968) J6(5,-7.968) J7(6,-7.968) J8(7,-7.968) J9(8,-7.968) J10(9,-7.968) J11(10,-7.968) J12(11,-7.968) J13(12,-7.968) J14(13,-7.968) J15(14,-7.968) J16(15,-7.968) J17(16,-7.968) J18(17,-7.968) J19(18,-7.968) J20(19,-7.968) J21(20,-7.968) J22(21,-7.968) K1(0,-8.968) K2(1,-8.968) K3(2,-8.968) K4(3,-8.968) K5(4,-8.968) K6(5,-8.968) K7(6,-8.968) K8(7,-8.968) K9(8,-8.968) K10(9,-8.968) K11(10,-8.968) K12(11,-8.968) K13(12,-8.968) K14(13,-8.968) K15(14,-8.968) K16(15,-8.968) K17(16,-8.968) K18(17,-8.968) K19(18,-8.968) K20(19,-8.968) K21(20,-8.968) K22(21,-8.968) L1(0,-9.968) L2(1,-9.968) L3(2,-9.968) L4(3,-9.968) L5(4,-9.968) L6(5,-9.968) L7(6,-9.968) L8(7,-9.968) L9(8,-9.968) L10(9,-9.968) L11(10,-9.968) L12(11,-9.968) L13(12,-9.968) L14(13,-9.968) L15(14,-9.968) L16(15,-9.968) L17(16,-9.968) L18(17,-9.968) L19(18,-9.968) L20(19,-9.968) L21(20,-9.968) L22(21,-9.968) M1(0,-10.968) M2(1,-10.968) M3(2,-10.968) M4(3,-10.968) M5(4,-10.968) M6(5,-10.968) M7(6,-10.968) M8(7,-10.968) M9(8,-10.968) M10(9,-10.968) M11(10,-10.968) M12(11,-10.968) M13(12,-10.968) M14(13,-10.968) M15(14,-10.968) M16(15,-10.968) M17(16,-10.968) M18(17,-10.968) M19(18,-10.968) M20(19,-10.968) M21(20,-10.968) M22(21,-10.968) N1(0,-11.968) N2(1,-11.968) N3(2,-11.968) N4(3,-11.968) N5(4,-11.968) N6(5,-11.968) N7(6,-11.968) N8(7,-11.968) N9(8,-11.968) N10(9,-11.968) N11(10,-11.968) N12(11,-11.968) N13(12,-11.968) N14(13,-11.968) N15(14,-11.968) N16(15,-11.968) N17(16,-11.968) N18(17,-11.968) N19(18,-11.968) N20(19,-11.968) N21(20,-11.968) N22(21,-11.968) P1(0,-12.968) P2(1,-12.968) P3(2,-12.968) P4(3,-12.968) P5(4,-12.968) P6(5,-12.968) P7(6,-12.968) P8(7,-12.968) P9(8,-12.968) P10(9,-12.968) P11(10,-12.968) P12(11,-12.968) P13(12,-12.968) P14(13,-12.968) P15(14,-12.968) P16(15,-12.968) P17(16,-12.968) P18(17,-12.968) P19(18,-12.968) P20(19,-12.968) P21(20,-12.968) P22(21,-12.968) R1(0,-13.968) R2(1,-13.968) R3(2,-13.968) R4(3,-13.968) R5(4,-13.968) R6(5,-13.968) R7(6,-13.968) R8(7,-13.968) R9(8,-13.968) R10(9,-13.968) R11(10,-13.968) R12(11,-13.968) R13(12,-13.968) R14(13,-13.968) R15(14,-13.968) R16(15,-13.968) R17(16,-13.968) R18(17,-13.968) R19(18,-13.968) R20(19,-13.968) R21(20,-13.968) R22(21,-13.968) T1(0,-14.968) T2(1,-14.968) T3(2,-14.968) T4(3,-14.968) T5(4,-14.968) T6(5,-14.968) T7(6,-14.968) T8(7,-14.968) T9(8,-14.968) T10(9,-14.968) T11(10,-14.968) T12(11,-14.968) T13(12,-14.968) T14(13,-14.968) T15(14,-14.968) T16(15,-14.968) T17(16,-14.968) T18(17,-14.968) T19(18,-14.968) T20(19,-14.968) T21(20,-14.968) T22(21,-14.968) U1(0,-15.968) U2(1,-15.968) U3(2,-15.968) U4(3,-15.968) U5(4,-15.968) U6(5,-15.968) U7(6,-15.968) U8(7,-15.968) U9(8,-15.968) U10(9,-15.968) U11(10,-15.968) U12(11,-15.968) U13(12,-15.968) U14(13,-15.968) U15(14,-15.968) U16(15,-15.968) U17(16,-15.968) U18(17,-15.968) U19(18,-15.968) U20(19,-15.968) U21(20,-15.968) U22(21,-15.968) V1(0,-16.968) V2(1,-16.968) V3(2,-16.968) V4(3,-16.968) V5(4,-16.968) V6(5,-16.968) V7(6,-16.968) V8(7,-16.968) V9(8,-16.968) V10(9,-16.968) V11(10,-16.968) V12(11,-16.968) V13(12,-16.968) V14(13,-16.968) V15(14,-16.968) V16(15,-16.968) V17(16,-16.968) V18(17,-16.968) V19(18,-16.968) V20(19,-16.968) V21(20,-16.968) V22(21,-16.968) W1(0,-17.968) W2(1,-17.968) W3(2,-17.968) W4(3,-17.968) W5(4,-17.968) W6(5,-17.968) W7(6,-17.968) W8(7,-17.968) W9(8,-17.968) W10(9,-17.968) W11(10,-17.968) W12(11,-17.968) W13(12,-17.968) W14(13,-17.968) W15(14,-17.968) W16(15,-17.968) W17(16,-17.968) W18(17,-17.968) W19(18,-17.968) W20(19,-17.968) W21(20,-17.968) W22(21,-17.968) Y1(0,-18.968) Y2(1,-18.968) Y3(2,-18.968) Y4(3,-18.968) Y5(4,-18.968) Y6(5,-18.968) Y7(6,-18.968) Y8(7,-18.968) Y9(8,-18.968) Y10(9,-18.968) Y11(10,-18.968) Y12(11,-18.968) Y13(12,-18.968) Y14(13,-18.968) Y15(14,-18.968) Y16(15,-18.968) Y17(16,-18.968) Y18(17,-18.968) Y19(18,-18.968) Y20(19,-18.968) Y21(20,-18.968) Y22(21,-18.968)
  silkscreen extent -1.44,-21.97 22,1.62, body extent -1,-21.97 22,1.03, height 2.54
KEY2 [mm]
  rect 1.5x1 smd mask+0.051: 1(0,0) 2(7.5,0)
  silkscreen extent 0.92,-1.5 6.57,1.5, body extent 0.92,-1.51 6.59,1.55, height 2.55
miniUSB [mm]
  rect 1.6x1.8 smd: 0(-6.2,-6.1) 0(-6.2,2.9) 0(-0.8,-6.1) 0(-0.8,2.9)
  rect 2.4x0.4 smd: 1(0,0) 2(0,-0.8) 3(0,-1.6) 4(0,-2.4) 5(0,-3.2)
  silkscreen extent -9.6,-6.1 0.08,2.9, body extent -9.6,-6.13 0.1,2.92, height 5
"OSC 7050-4P" [mm] "7mm*5mm*1.3mm(长*宽*高)"
  rect 2x1.8 smd: 1(-2.54,-2.1)
  rrect50% 2x1.8 smd: 2(2.54,-2.1) 3(2.54,2.1) 4(-2.54,2.1)
  silkscreen extent -3.81,-3.3 3.56,2.61, body extent -3.5,-2.5 3.5,2.5, height 1.36
SOP8W [mil]
  oval 70x27.56 smd: 1(0,0) 2(0,-50) 3(0,-100) 4(0,-150) 5(281.59,-150) 6(281.59,-100) 7(281.59,-50) 8(281.59,0)
  silkscreen extent 48,-178 228,26, body extent 19,-173 263,23, height 69
SOT23-6 [mm] "SOT-23/SC-74A; 5 Leads; Body 3.1 x 3 mm, inc. leads (LxW max)"
  rect 1x0.5 smd: 1(0,0) 2(0,-0.95) 3(0,-1.9) 4(2.4,-1.9) 5(2.4,-0.95) 6(2.4,0)
  silkscreen extent 0.76,-2.45 1.65,0.55, body extent -0.05,-2.41 2.29,0.51, height 1
TFBGA96 [mm]
  round 0.35 smd: A1(0,0) A2(0.8,0) A3(1.6,0) A7(4.8,0) A8(5.6,0) A9(6.4,0) B1(0,-0.8) B2(0.8,-0.8) B3(1.6,-0.8) B7(4.8,-0.8) B8(5.6,-0.8) B9(6.4,-0.8) C1(0,-1.6) C2(0.8,-1.6) C3(1.6,-1.6) C7(4.8,-1.6) C8(5.6,-1.6) C9(6.4,-1.6) D1(0,-2.4) D2(0.8,-2.4) D3(1.6,-2.4) D7(4.8,-2.4) D8(5.6,-2.4) D9(6.4,-2.4) E1(0,-3.2) E2(0.8,-3.2) E3(1.6,-3.2) E7(4.8,-3.2) E8(5.6,-3.2) E9(6.4,-3.2) F1(0,-4) F2(0.8,-4) F3(1.6,-4) F7(4.8,-4) F8(5.6,-4) F9(6.4,-4) G1(0,-4.8) G2(0.8,-4.8) G3(1.6,-4.8) G7(4.8,-4.8) G8(5.6,-4.8) G9(6.4,-4.8) H1(0,-5.6) H2(0.8,-5.6) H3(1.6,-5.6) H7(4.8,-5.6) H8(5.6,-5.6) H9(6.4,-5.6) J1(0,-6.4) J2(0.8,-6.4) J3(1.6,-6.4) J7(4.8,-6.4) J8(5.6,-6.4) J9(6.4,-6.4) K1(0,-7.2) K2(0.8,-7.2) K3(1.6,-7.2) K7(4.8,-7.2) K8(5.6,-7.2) K9(6.4,-7.2) L1(0,-8) L2(0.8,-8) L3(1.6,-8) L7(4.8,-8) L8(5.6,-8) L9(6.4,-8) M1(0,-8.8) M2(0.8,-8.8) M3(1.6,-8.8) M7(4.8,-8.8) M8(5.6,-8.8) M9(6.4,-8.8) N1(0,-9.6) N2(0.8,-9.6) N3(1.6,-9.6) N7(4.8,-9.6) N8(5.6,-9.6) N9(6.4,-9.6) P1(0,-10.4) P2(0.8,-10.4) P3(1.6,-10.4) P7(4.8,-10.4) P8(5.6,-10.4) P9(6.4,-10.4) R1(0,-11.2) R2(0.8,-11.2) R3(1.6,-11.2) R7(4.8,-11.2) R8(5.6,-11.2) R9(6.4,-11.2) T1(0,-12) T2(0.8,-12) T3(1.6,-12) T7(4.8,-12) T8(5.6,-12) T9(6.4,-12)
  silkscreen extent -1.77,-12.6 7.8,1.22, body extent -1.4,-12.6 7.8,0.6, height 1.4

## Part data
C1 C2 C3 C4 C5 C6 C7 C8 C9 C10 C11 C12 C13 C14 C16 C17 C20 C21 C22 C23 C24 C26 C27 C29 C30 C31 C32 C33 C34 C35 C36 C37 C38 C39 C40 C41 C42 C43 C44 C45 C46 C47 C48 C49 C50 C51 C52 C53 C54 C55 C56 C57 C58 C59 C60 C61 C62 C63 C64 C65 C66 C67 C68 C69 C70 C71 C72 C73 C74 C75 C76 C77 C78 C79 C80 C81 C82 C83 C84 C85 C86 C87 C88 C89 C90 C91 C92 C93 C94 C95 C96 C97 C98 C99 C100 C102 C103 C104: library part CAP
D1: library part D4
F1: library part FUSE1
J1 J2 J3: library part CON80_1
J4: library part CON14
K1: library part KEY1
L1 L2 L3 L4 L5: library part INDUCTOR1
R1 R2 R3 R4 R5 R6 R7 R8 R9 R10 R11 R12 R13 R14 R15 R16 R17 R18 R19 R20 R21 R22 R23 R24 R25 R26 R27 R28 R29 R30 R31 R32 R33 R34 R35 R36 R37 R38 R39 R40 R41 R42 R43 R44 R45 R46 R47 R48 R49 R50 R51 R52 R53 R54 R55 R56 R57 R58 R59 R60 R61 R62 R63 R64: library part RES2
U3: library part XC7A200T-1FBG484I, "Artix-7 FPGA, 285 User I/Os, 4 GTP, 484-Ball BGA, Speed Grade 1, Industrial Grade, Pb-Free"
U4: library part N25Q128A11EF840E
U5 U6 U7 U8 U9: library part JW5060TTSOTB#PBF
V1 V2 V3 V4: library part LED2
Y1: library part XTAL

## Via types
v1: diameter 17.72, hole 7.87, Top Layer to Bottom Layer, tented both sides, 145 vias

## Nets (pads, with @x,y where several pads share a name; then routed paths per layer and width w, separated by ;. In a path a pad name is that pad's centre, name@x,y a point inside that pad or via, vN(x,y) a via of type N, cw(c..) or ccw(c..) an arc to the next point about the centre after c; other vN are vias at no path point)
AA1: J1.18 U3.AA1 | length 631.6
  Top Layer w6: J1.18@617.14,116.75 923.69,423.3 923.69,593.37 U3.AA1@943.47,613.15
AA3: J1.10 U3.AA3 | length 866.4
  Top Layer w10: U3.AA3@1022.21,613.15 v1(1041.9,632.83)
  SIG1 w4: J1.10@417.39,116 914.72,613.33 1022.39,613.33 v1(1041.9,632.83)
AA4: J1.34 U3.AA4 | length 526.1
  Top Layer w6: J1.34@1022.14,119.75 1081.36,178.97 1081.36,593.37 U3.AA4@1061.58,613.15
AA5: J1.36 U3.AA5 | length 524.6
  Top Layer w6: J1.36@1071.14,117.25 1120.73,166.84 1120.73,593.37 U3.AA5@1100.95,613.15
AA6: J1.38 U3.AA6 | length 522.2
  Top Layer w6: J1.38@1117.64,116.75 1160.1,159.21 1160.1,593.37 U3.AA6@1140.32,613.15
AA8: J1.40 U3.AA8 | length 515.5
  Top Layer w6: J1.40@1168.14,118.75 1199.28,149.89 1199.28,593.37 U3.AA8@1219.06,613.15
AA9: J1.47 U3.AA9 | length 621
  Top Layer w10: v1(1238.74,593.46) U3.AA9@1258.43,613.15
  SIG1 w4: v1(1238.74,593.46) 1255.89,576.32 1255.89,223 1351.39,127.5 1351.39,83 J1.47@1376.89,57.5
AA10: J1.42 U3.AA10 | length 528.3
  Top Layer w6: J1.42@1218.89,117.5 1278.02,176.63 1278.02,593.37 U3.AA10@1297.8,613.15
AA11: J1.44 U3.AA11 | length 523.5
  Top Layer w6: J1.44@1268.14,118.25 1317.39,167.5 1317.39,593.37 U3.AA11@1337.17,613.15
AA13: J1.45 U3.AA13 | length 592.5
  Top Layer w6: J1.45@1326.89,57.5 1351.89,82.5 1351.89,126.5 1396.13,170.74 1396.13,593.37 U3.AA13@1415.91,613.15
AA14: J1.64 U3.AA14 | length 635.8
  Top Layer w6: U3.AA14@1455.28,613.15 1475.06,593.37 1475.06,422.33 J1.64@1783.89,113.5
AA15: J1.66 U3.AA15 | length 638.4
  Top Layer w6: U3.AA15@1494.65,613.15 1514.43,593.37 1514.43,438.96 J1.66@1836.89,116.5
AA16: J1.68 U3.AA16 | length 642.9
  Top Layer w6: U3.AA16@1534.02,613.15 1553.8,593.37 1553.8,451.59 J1.68@1888.39,117
AA18: J1.70 U3.AA18 | length 646.5
  Top Layer w6: U3.AA18@1612.76,613.15 1592.98,593.37 1592.98,461.91 J1.70@1937.39,117.5
AA19: J1.79 U3.AA19 | length 802.9
  Top Layer w6: U3.AA19@1652.13,613.15 1671.91,593.37 1671.91,555.48 2076.39,151 2127.39,151 2152.39,126 2152.39,82 J1.79@2176.89,57.5
AA20: J2.79 U3.AA20 | length 828
  Top Layer w6: U3.AA20@1691.5,613.15 1711.28,593.37 1711.28,560.61 2091.89,180 2147.61,180 J2.79@2270.11,57.5
AA21: J2.77 U3.AA21 | length 766.8
  Top Layer w6: U3.AA21@1730.87,613.15 1750.65,593.37 1750.65,564.74 2102.89,212.5 2155.89,212.5 2171.39,197 J2.77@2268.39,100
AB1: J1.17 U3.AB1 | length 647.4
  Top Layer w6: J1.17@626.89,57.5 651.89,82.5 651.89,126.5 943.47,418.08 U3.AB1@943.47,573.78
AB2: J1.19 U3.AB2 | length 643
  Top Layer w6: J1.19@676.89,57.5 701.89,82.5 701.89,124.5 982.84,405.45 U3.AB2@982.84,573.78
AB3: J1.22 U3.AB3 | length 581.9
  Top Layer w6: J1.22@721.39,116.5 1022.21,417.32 U3.AB3@1022.21,573.78
AB5: J1.33 U3.AB5 | length 547
  Top Layer w6: J1.33@1026.89,57.5 1051.89,82.5 1051.89,126.5 1100.95,175.56 U3.AB5@1100.95,573.78
AB6: J1.35 U3.AB6 | length 542.6
  Top Layer w6: J1.35@1076.89,57.5 1102.39,83 1102.39,127 1140.32,164.93 U3.AB6@1140.32,573.78
AB7: J1.37 U3.AB7 | length 538.1
  Top Layer w6: J1.37@1126.89,57.5 1152.39,83 1152.39,127.5 1179.69,154.8 U3.AB7@1179.69,573.78
AB8: J1.39 U3.AB8 | length 533.7
  Top Layer w6: J1.39@1176.89,57.5 1202.39,83 1202.39,128 1219.06,144.67 U3.AB8@1219.06,573.78
AB10: J1.41 U3.AB10 | length 545.7
  Top Layer w6: J1.41@1226.89,57.5 1251.89,82.5 1251.89,128.5 1297.8,174.41 U3.AB10@1297.8,573.78
AB11: J1.43 U3.AB11 | length 541.2
  Top Layer w6: J1.43@1276.89,57.5 1302.39,83 1302.39,127.5 1337.17,162.28 U3.AB11@1337.17,573.78
AB12: J1.46 U3.AB12 | length 480
  Top Layer w6: J1.46@1319.64,116.75 1375.89,173 U3.AB12@1375.89,573.5
AB13: J1.48 U3.AB13 | length 478
  Top Layer w6: J1.48@1367.64,115.75 1418.89,167 U3.AB13@1418.89,572.5
AB15: J1.65 U3.AB15 | length 653.9
  Top Layer w6: U3.AB15@1494.65,573.78 1494.65,433.24 1802.39,125.5 1802.39,82 J1.65@1826.89,57.5
AB16: J1.67 U3.AB16 | length 656.4
  Top Layer w6: U3.AB16@1534.39,572 1534.39,445.5 1852.39,127.5 1852.39,82 J1.67@1876.89,57.5
AB17: J1.69 U3.AB17 | length 662.7
  Top Layer w6: U3.AB17@1573.39,573.78 1573.39,457.5 1901.89,129 1901.89,82.5 J1.69@1926.89,57.5
AB18: J1.71 U3.AB18 | length 667.1
  Top Layer w6: U3.AB18@1612.76,573.78 1612.76,465.13 1951.89,126 1951.89,82.5 J1.71@1976.89,57.5
AB20: J1.80 U3.AB20 | length 693.4
  Top Layer w6: U3.AB20@1691.5,573.78 1691.5,557.39 2083.39,165.5 2136.89,165.5 J1.80@2185.89,116.5
AB21: J2.80 U3.AB21 | length 817.3
  Top Layer w6: U3.AB21@1730.87,573.78 1730.87,561.02 2096.39,195.5 2148.89,195.5 2261.39,83 2301.39,83 J2.80@2326.89,57.5
AB22: J2.78 U3.AB22 | length 749.8
  Top Layer w6: U3.AB22@1770.24,573.78 2114.52,229.5 2162.89,229.5 2259.89,132.5 2301.89,132.5 J2.78@2326.89,107.5
ADC_VN: J3.35 U3.M9 | length 1057
  Top Layer w10: v1(1238.74,987.17) U3.M9@1258.43,967.48
  SIG1 w4: J3.35@1077.39,1957.5 cw(c1041.18,1921.29) 1092.39,1921.29 1092.39,1818.57 ccw(c1274.84,1818.57) 1145.83,1689.56 1196.32,1639.07 cw(c1056.13,1498.88) 1254.39,1498.88 1254.39,1023.73 cw(c1202.68,1023.73) v1@1239.24,987.17
ADC_VP: J3.36 U3.L10 | length 1071.4
  Top Layer w10: v1(1278.11,1026.54) U3.L10@1297.8,1006.85
  SIG1 w4: J3.36@1076.89,2007.5 J3.36@1087.07,1997.32 ; J3.36@1086.57,1997.32 cw(c1050.81,1961.55) 1101.39,1961.55 1101.39,1820.07 ccw(c1280.88,1820.07) 1153.96,1693.16 1203.42,1643.69 cw(c1061.07,1501.34) 1262.39,1501.34 1262.39,1063.29 ccw(c1314.37,1063.29) v1@1277.61,1026.54
DDR3_A0: R4.1 U2.N3 U3.P2
DDR3_A1: R5.1 U2.P7 U3.K3
DDR3_A2: R6.1 U2.P3 U3.N5
DDR3_A3: R7.1 U2.N2 U3.M6
DDR3_A4: R8.1 U2.P8 U3.M2
DDR3_A5: R9.1 U2.P2 U3.N3
DDR3_A6: R10.1 U2.R8 U3.M3
DDR3_A7: R11.1 U2.R2 U3.N4
DDR3_A8: R12.1 U2.T8 U3.L3
DDR3_A9: R13.1 U2.R3 U3.P6
DDR3_A10: R14.1 U2.L7 U3.L4
DDR3_A11: R15.1 U2.R7 U3.J6
DDR3_A12: R16.1 U2.N7 U3.L5
DDR3_A13: R17.1 U2.T3 U3.K6
DDR3_BA0: R22.1 U2.M2 U3.N2
DDR3_BA1: R23.1 U2.N8 U3.L1
DDR3_BA2: R24.1 U2.M3 U3.M5
DDR3_CAS: R20.1 U2.K3 U3.R1
DDR3_CKE: R27.1 U2.K9 U3.K4
DDR3_CLK_N: R21.1 U2.K7 U3.P4
DDR3_CLK_P: R21.2 U2.J7 U3.P5
DDR3_CS: R26.1 U2.L2 U3.L6
DDR3_D0: U2.E3 U3.H4
DDR3_D1: U2.F7 U3.G2
DDR3_D2: U2.F2 U3.H2
DDR3_D3: U2.F8 U3.K1
DDR3_D4: U2.H3 U3.J5
DDR3_D5: U2.H8 U3.H3
DDR3_D6: U2.G2 U3.H5
DDR3_D7: U2.H7 U3.G3
DDR3_D8: U2.D7 U3.B2
DDR3_D9: U2.C3 U3.F1
DDR3_D10: U2.C8 U3.A1
DDR3_D11: U2.C2 U3.D2
DDR3_D12: U2.A7 U3.B1
DDR3_D13: U2.A2 U3.G1
DDR3_D14: U2.B8 U3.C2
DDR3_D15: U2.A3 U3.F3
DDR3_DML: U2.E7 U3.J1
DDR3_DMU: U2.D3 U3.E2
DDR3_DS0_N: U2.G3 U3.J2
DDR3_DS0_P: U2.F3 U3.K2
DDR3_DS1_N: U2.B7 U3.D1
DDR3_DS1_P: U2.C7 U3.E1
DDR3_ODT: R28.1 U2.K1 U3.P1
DDR3_RAS: R19.1 U2.J3 U3.J4
DDR3_RESET: R29.1 U2.T2 U3.F4
DDR3_VREF: C13.2 C14.1 C21.1 C30.1 R1.1 R2.2 U2.H1 U2.M8
DDR3_VTT: C16.1 C20.2 C23.1 C26.1 C27.1 C29.1 C31.1 C32.1 R3.2 R4.2 R5.2 R6.2 R7.2 R8.2 R9.2 R10.2 R11.2 R12.2 R13.2 R14.2 R15.2 R16.2 R17.2 R18.2 R19.2 R20.2 R22.2 R23.2 R24.2 R62.1
DDR3_WE: R18.1 U2.L3 U3.M1
G15: J2.5 U3.G15 | length 1215.4
  Top Layer w10: U3.G15@1494.65,1164.33 v1(1514.34,1184.02)
  SIG2 w4: v1(1514.34,1184.02) 1532.89,1202.57 1758.46,1202.57 2106.89,1551 2106.89,1765 2249.39,1907.5 J2.5@2276.89,1907.5
G16: J2.6 U3.G16 | length 1284.5
  Top Layer w10: U3.G16@1534.02,1164.33 v1(1553.71,1144.64)
  SIG2 w4: v1(1553.71,1144.64) 1577.56,1168.5 1816.89,1168.5 2119.89,1471.5 2119.89,1757.5 2245.89,1883.5 2302.89,1883.5 J2.6@2326.89,1907.5
G17: J3.38 U3.G17 | length 1128.4
  Top Layer w10: v1(1553.7,1184.02) U3.G17@1573.39,1164.33
  SIG1 w4: v1(1553.7,1184.02) 1534.72,1203 1465,1203 1425,1243 1388.89,1243 1376.89,1255 1376.89,1545.68 ccw(c1102.12,1545.68) 1296.41,1739.98 1198.5,1837.89 cw(c1308.61,1948) 1152.89,1948 ; 1152.89,1948 ccw(c1072.01,1948) 1129.2,2005.19 cw(c1072.01,1948) 1152.89,1948
G18: J2.7 U3.G18 | length 1132.5
  Top Layer w10: U3.G18@1612.76,1164.33 v1(1632.45,1144.64)
  SIG2 w4: v1(1632.45,1144.64) 1648.3,1160.5 1825,1160.5 2132.89,1468.39 2132.89,1750 2240.39,1857.5 J2.7@2276.89,1857.5
GCLK: R34.2 U3.W19
GND: C1.2 C2.2 C3.2 C4.2 C5.2 C6.2 C7.2 C8.2 C9.2 C10.2 C11.2 C12.2 C14.2 C16.2 C17.2 C21.2 C22.2 C23.2 C24.2 C26.2 C27.2 C29.2 C30.2 C31.2 C32.2 C33.2 C34.2 C35.2 C36.2 C37.2 C38.2 C39.2 C40.2 C41.2 C42.2 C43.2 C44.2 C45.2 C46.2 C47.2 C48.2 C49.2 C50.2 C51.2 C52.2 C53.2 C54.2 C55.2 C56.2 C57.2 C58.2 C59.2 C60.2 C61.2 C62.2 C63.2 C64.2 C65.2 C66.2 C67.2 C68.2 C69.2 C70.2 C71.2 C72.2 C73.2 C74.2 C76.2 C77.2 C78.2 C79.2 C82.2 C83.2 C84.2 C85.2 C86.2 C87.2 C90.2 C91.2 C92.2 C93.2 C94.2 C95.2 C96.2 C97.2 C98.2 C99.2 C100.2 C102.2 C103.2 C104.2 D1.1 J2.1 J2.2 J2.3 J2.4 J3.3 J3.4 J3.9 J3.10 J3.11 J3.12 J3.33 J3.34 J4.1 J4.2 J4.3 J4.4 J4.5 J4.6 J4.7 J5.0 J5.5 K1.2 R2.1 R3.1 R25.1 R26.2 R27.2 R28.2 R29.2 R46.2 R51.2 R52.2 R57.2 R58.2 U2.A9 U2.B1 U2.B3 U2.B9 U2.D1 U2.D8 U2.E1 U2.E2 U2.E8 U2.F9 U2.G1 U2.G8 U2.G9 U2.J2 U2.J8 U2.M1 U2.M9 U2.P1 U2.P9 U2.T1 U2.T9 U3.A2 U3.A3 U3.A5 U3.A7 U3.A8 U3.A9 U3.A10 U3.A11 U3.A12 U3.A22 U3.AA2 U3.AA12 U3.AA22 U3.AB9 U3.AB19 U3.B3 U3.B5 U3.B7 U3.B8 U3.B9 U3.B10 U3.B11 U3.B12 U3.B19 U3.C3 U3.C4 U3.C6 U3.C8 U3.C9 U3.C10 U3.C11 U3.C12 U3.C16 U3.D3 U3.D4 U3.D6 U3.D8 U3.D9 U3.D10 U3.D11 U3.D12 U3.D13 U3.E4 U3.E5 U3.E7 U3.E8 U3.E9 U3.E11 U3.E12 U3.E20 U3.F5 U3.F7 U3.F8 U3.F9 U3.F11 U3.F17 U3.G5 U3.G6 U3.G7 U3.G8 U3.G9 U3.G10 U3.G12 U3.G14 U3.H1 U3.H7 U3.H9 U3.H11 U3.H21 U3.J8 U3.J10 U3.J12 U3.J18 U3.K5 U3.K7 U3.K9 U3.K11 U3.K15 U3.L2 U3.L8 U3.L9 U3.L22 U3.M7 U3.M10 U3.M11 U3.M19 U3.N6 U3.N8 U3.N9 U3.N10 U3.N16 U3.P3 U3.P7 U3.P9 U3.P11 U3.P13 U3.R8 U3.R10 U3.R12 U3.R20 U3.T7 U3.T9 U3.T11 U3.T17 U3.U4 U3.U9 U3.U10 U3.U14 U3.V1 U3.V11 U3.V21 U3.W8 U3.W18 U3.Y5 U3.Y15 U4.4 U5.1 U6.1 U7.1 U8.1 U9.1 V2.2 Y1.2
  other v1: 194.36,1558.75 194.36,1731.98
H13: J3.37 K1.1 R36.1 U3.H13 | length 2702.6
  Top Layer w5: v1(1038.24,1868.86) J3.37@1126.89,1957.5
  Top Layer w10: v1(90.69,1318.19) K1.1@90.69,1387.68 ; v1(1396.22,1105.27) U3.H13@1415.91,1124.96
  SIG2 w4: v1(90.69,1318.19) 131.7,1359.2 131.7,1784.5 256.8,1909.6 890.1,1909.6 930.84,1868.86 v1(1038.24,1868.86)
  SIG1 w4: J3.37@1126.89,1957.5 ccw(c1312.78,1957.5) 1181.34,1826.05 1245.91,1761.48 cw(c1023.87,1539.43) 1337.89,1539.43 1337.89,1122 1354.62,1105.27 v1(1396.22,1105.27)
  Bottom Layer w10: R36.1@90.69,1263.5 v1(90.69,1318.19)
H14: J3.31 U3.H14 V3.2 | length 2638.8
  Top Layer w8: v1(237.85,1330.85) V3.2@273.7,1295
  Top Layer w10: U3.H14@1455.28,1124.96 v1(1474.97,1105.27)
  SIG2 w4: J3.31@976.89,1957.5 1020.09,1914.3 1246.09,1914.3 1420.5,1739.89 1420.5,1159.74 v1(1474.97,1105.27)
  SIG1 w4: v1(237.85,1330.85) 237.85,1387.75 162.8,1462.8 162.8,1782.5 271.6,1891.3 910.69,1891.3 J3.31@976.89,1957.5
H15: J2.9 U3.H15 | length 1246.6
  Top Layer w10: U3.H15@1494.65,1124.96 v1(1514.34,1105.27)
  SIG2 w4: v1(1514.34,1105.27) 1537.84,1128.78 1829.94,1128.78 2157.89,1456.73 2157.89,1738.89 2226.5,1807.5 J2.9@2276.89,1807.5
H17: J2.11 U3.H17 | length 1123.6
  Top Layer w10: U3.H17@1573.39,1124.96 v1(1593.08,1105.27)
  SIG2 w4: v1(1593.08,1105.27) 1608.94,1089.41 1821.3,1089.41 2207.39,1475.5 2207.39,1704.5 J2.11@2268.14,1765.25
H18: J2.10 U3.H18 | length 1154.1
  Top Layer w10: U3.H18@1612.76,1124.96 v1(1632.45,1105.27)
  SIG2 w4: v1(1632.45,1105.27) 1647.95,1120.78 1836.28,1120.78 2194.89,1479.39 2194.89,1720 2256.89,1782 2301.39,1782 J2.10@2326.89,1807.5
H19: J2.8 U3.H19 | length 1141
  Top Layer w10: U3.H19@1652.13,1124.96 v1(1671.82,1144.65)
  SIG2 w4: v1(1671.82,1144.65) 1825.54,1144.65 2144.89,1464 2144.89,1741.89 2235,1832 2301.39,1832 J2.8@2326.89,1857.5
H20: J2.27 U3.H20 | length 674.1
  Top Layer w6: U3.H20@1691.5,1124.96 1711.28,1144.74 2049.13,1144.74 J2.27@2267.14,1362.75
H22: J2.28 U3.H22 | length 653
  Top Layer w6: U3.H22@1770.24,1124.96 2050.35,1124.96 2257.89,1332.5 2301.89,1332.5 J2.28@2326.89,1357.5
J14: J3.29 U3.J14 V4.2 | length 2810.5
  Top Layer w8: v1(228.1,1231.5) V4.2@273.6,1186
  Top Layer w10: U3.J14@1455.28,1085.59 v1(1474.97,1065.9)
  SIG2 w4: J3.29@926.89,1957.5 983.79,1900.6 1238.2,1900.6 1412.09,1726.71 1412.09,1104.3 1450.49,1065.9 v1(1474.97,1065.9)
  SIG1 w4: v1(228.1,1231.5) 149.3,1310.3 149.3,1786.9 265.2,1902.8 872.19,1902.8 J3.29@926.89,1957.5
J15: J2.17 U3.J15 | length 1055.1
  Top Layer w10: U3.J15@1494.65,1085.59 v1(1514.34,1065.9)
  SIG1 w4: v1(1514.34,1065.9) 1529.93,1081.5 1818.89,1081.5 2045.39,1308 2045.39,1390 J2.17@2267.39,1612
J16: J2.16 U3.J16 | length 1097.5
  Top Layer w10: U3.J16@1534.02,1085.59 v1(1553.71,1105.28)
  SIG1 w4: v1(1553.71,1105.28) 1568.98,1090 1810,1090 2032.89,1312.89 2032.89,1407 2258.39,1632.5 2301.89,1632.5 J2.16@2326.89,1657.5
J17: J2.13 U3.J17 | length 1110.4
  Top Layer w10: U3.J17@1573.39,1085.59 v1(1593.08,1065.9)
  SIG2 w4: v1(1593.08,1065.9) 1608.94,1050.04 1817.43,1050.04 2230.89,1463.5 2230.89,1677 J2.13@2268.64,1714.75
J19: J2.15 U3.J19 | length 916.7
  Top Layer w10: U3.J19@1652.13,1085.59 v1(1671.82,1105.28)
  SIG1 w4: v1(1671.82,1105.28) 1691.04,1124.5 1826.89,1124.5 2018.39,1316 2018.39,1418.5 J2.15@2267.64,1667.75